# EAGLE board BigEasyDriver-Panel-v16 (EAGLE 6.6.0), part 1 of 5
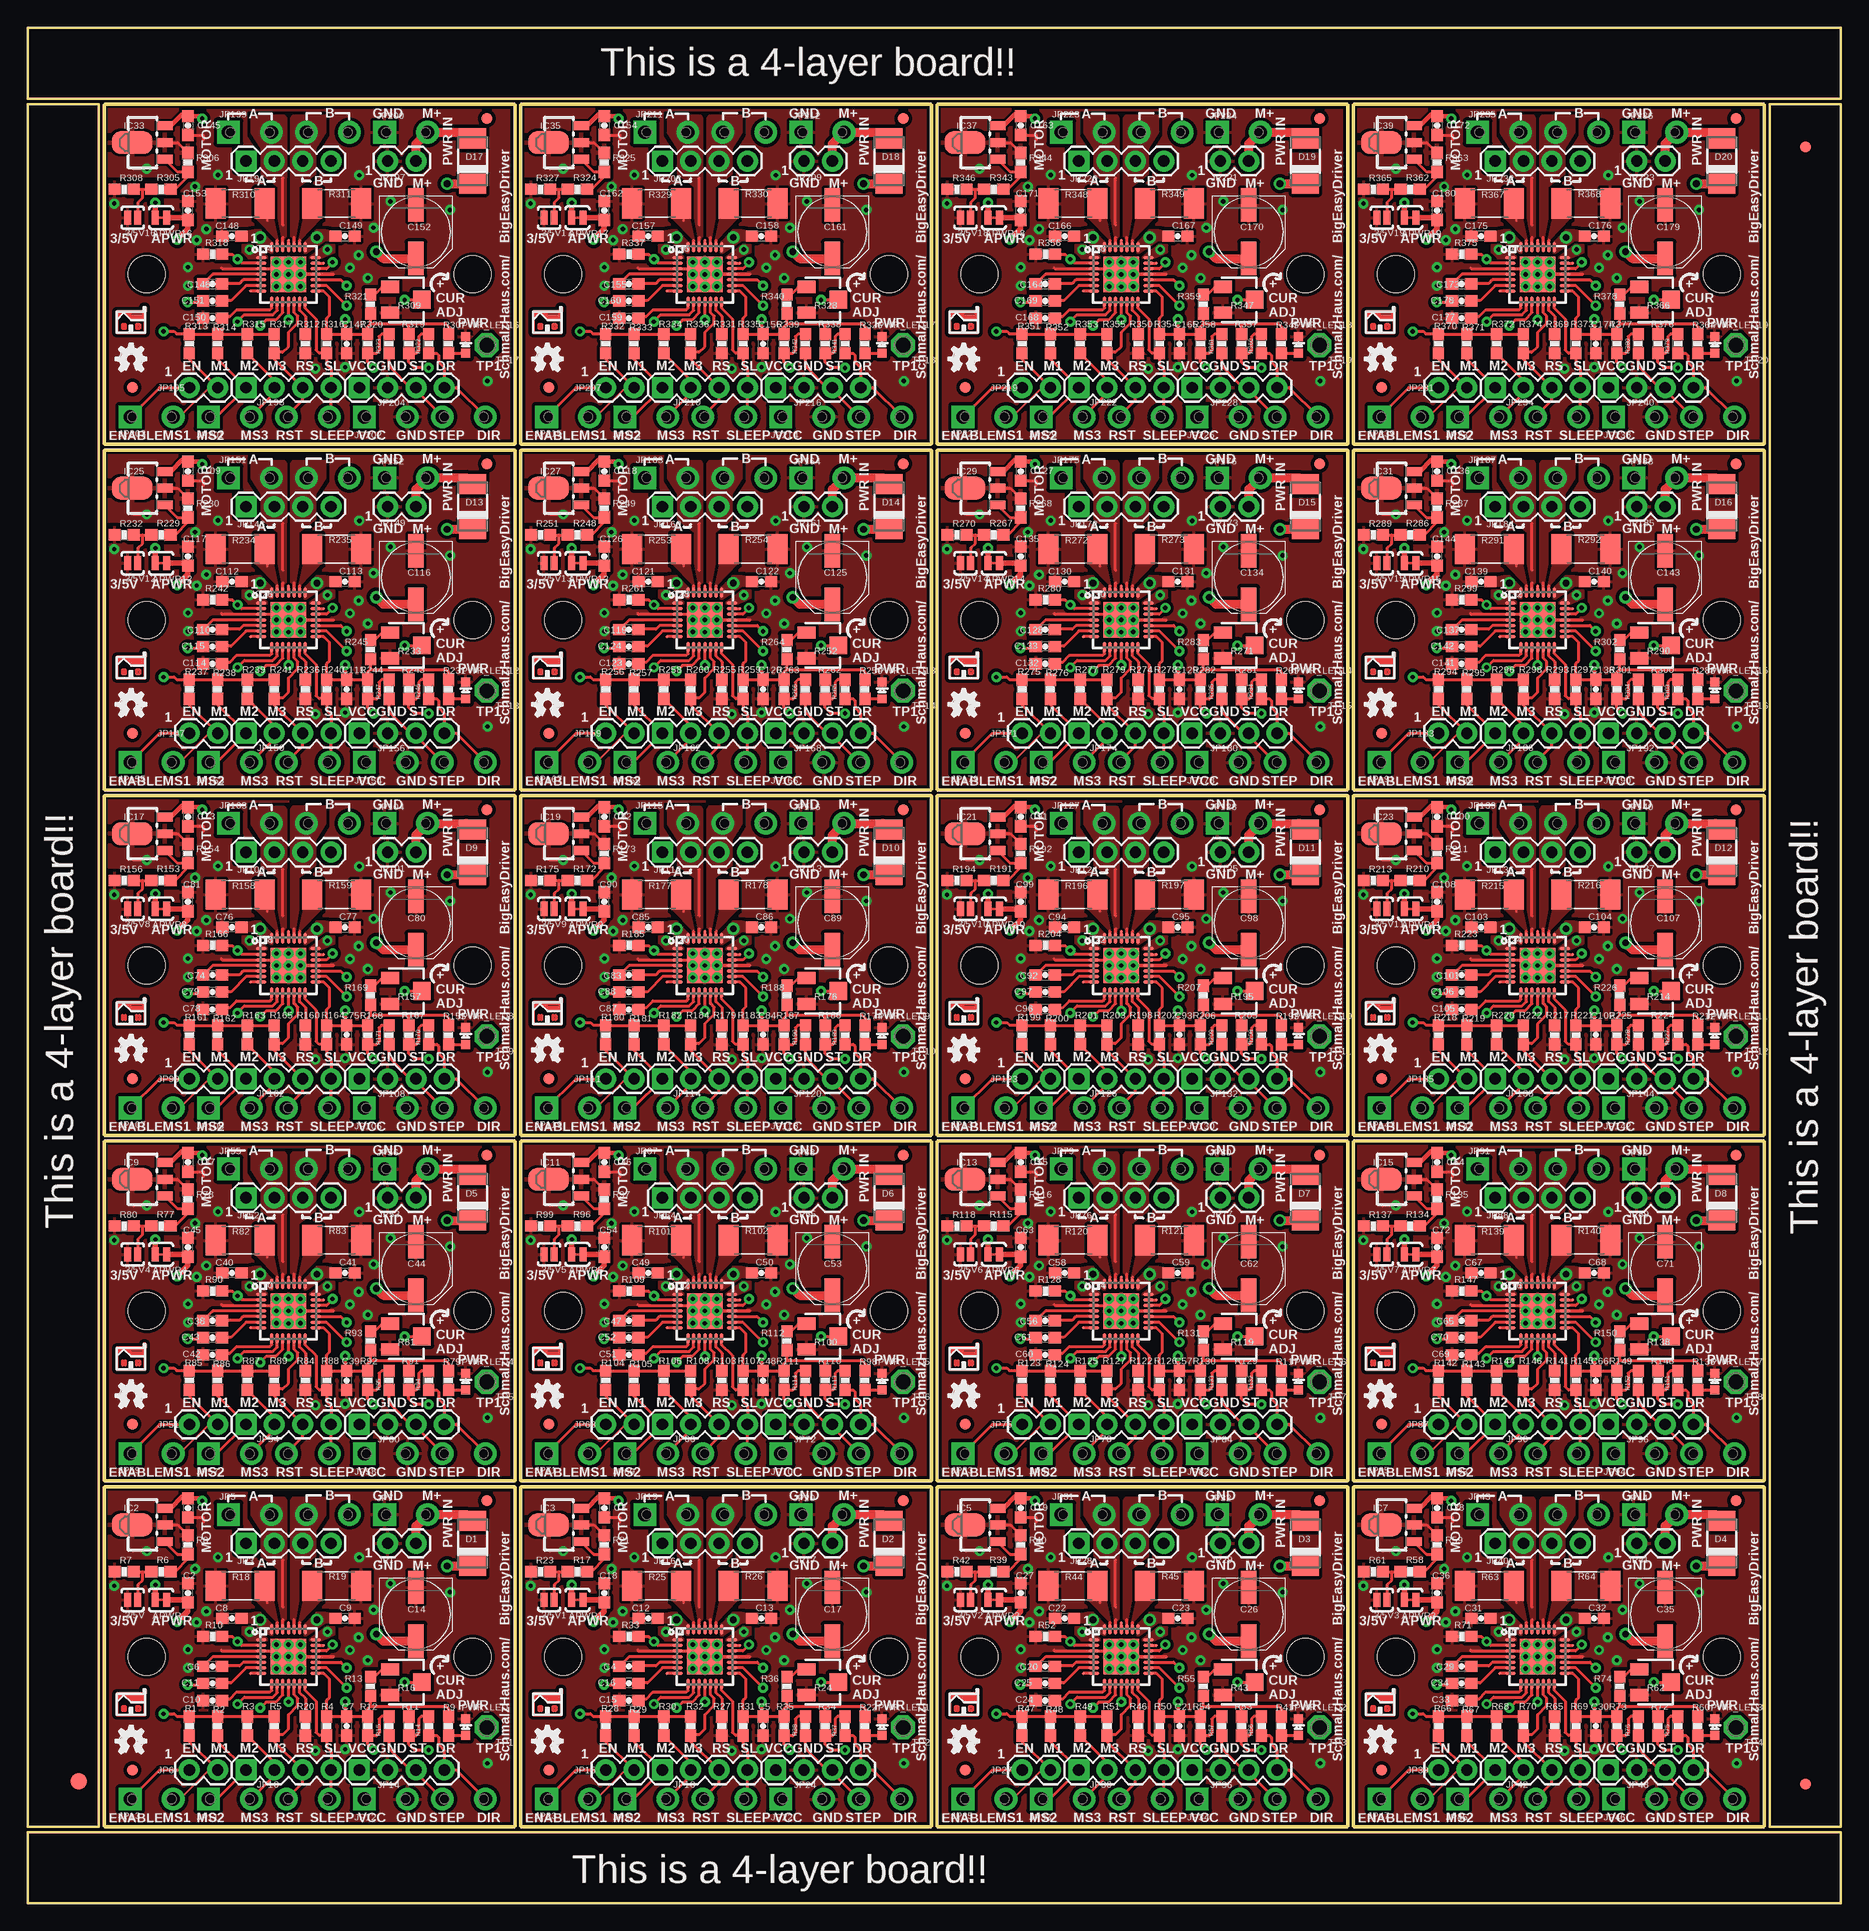
[diagram p0: board, top side]
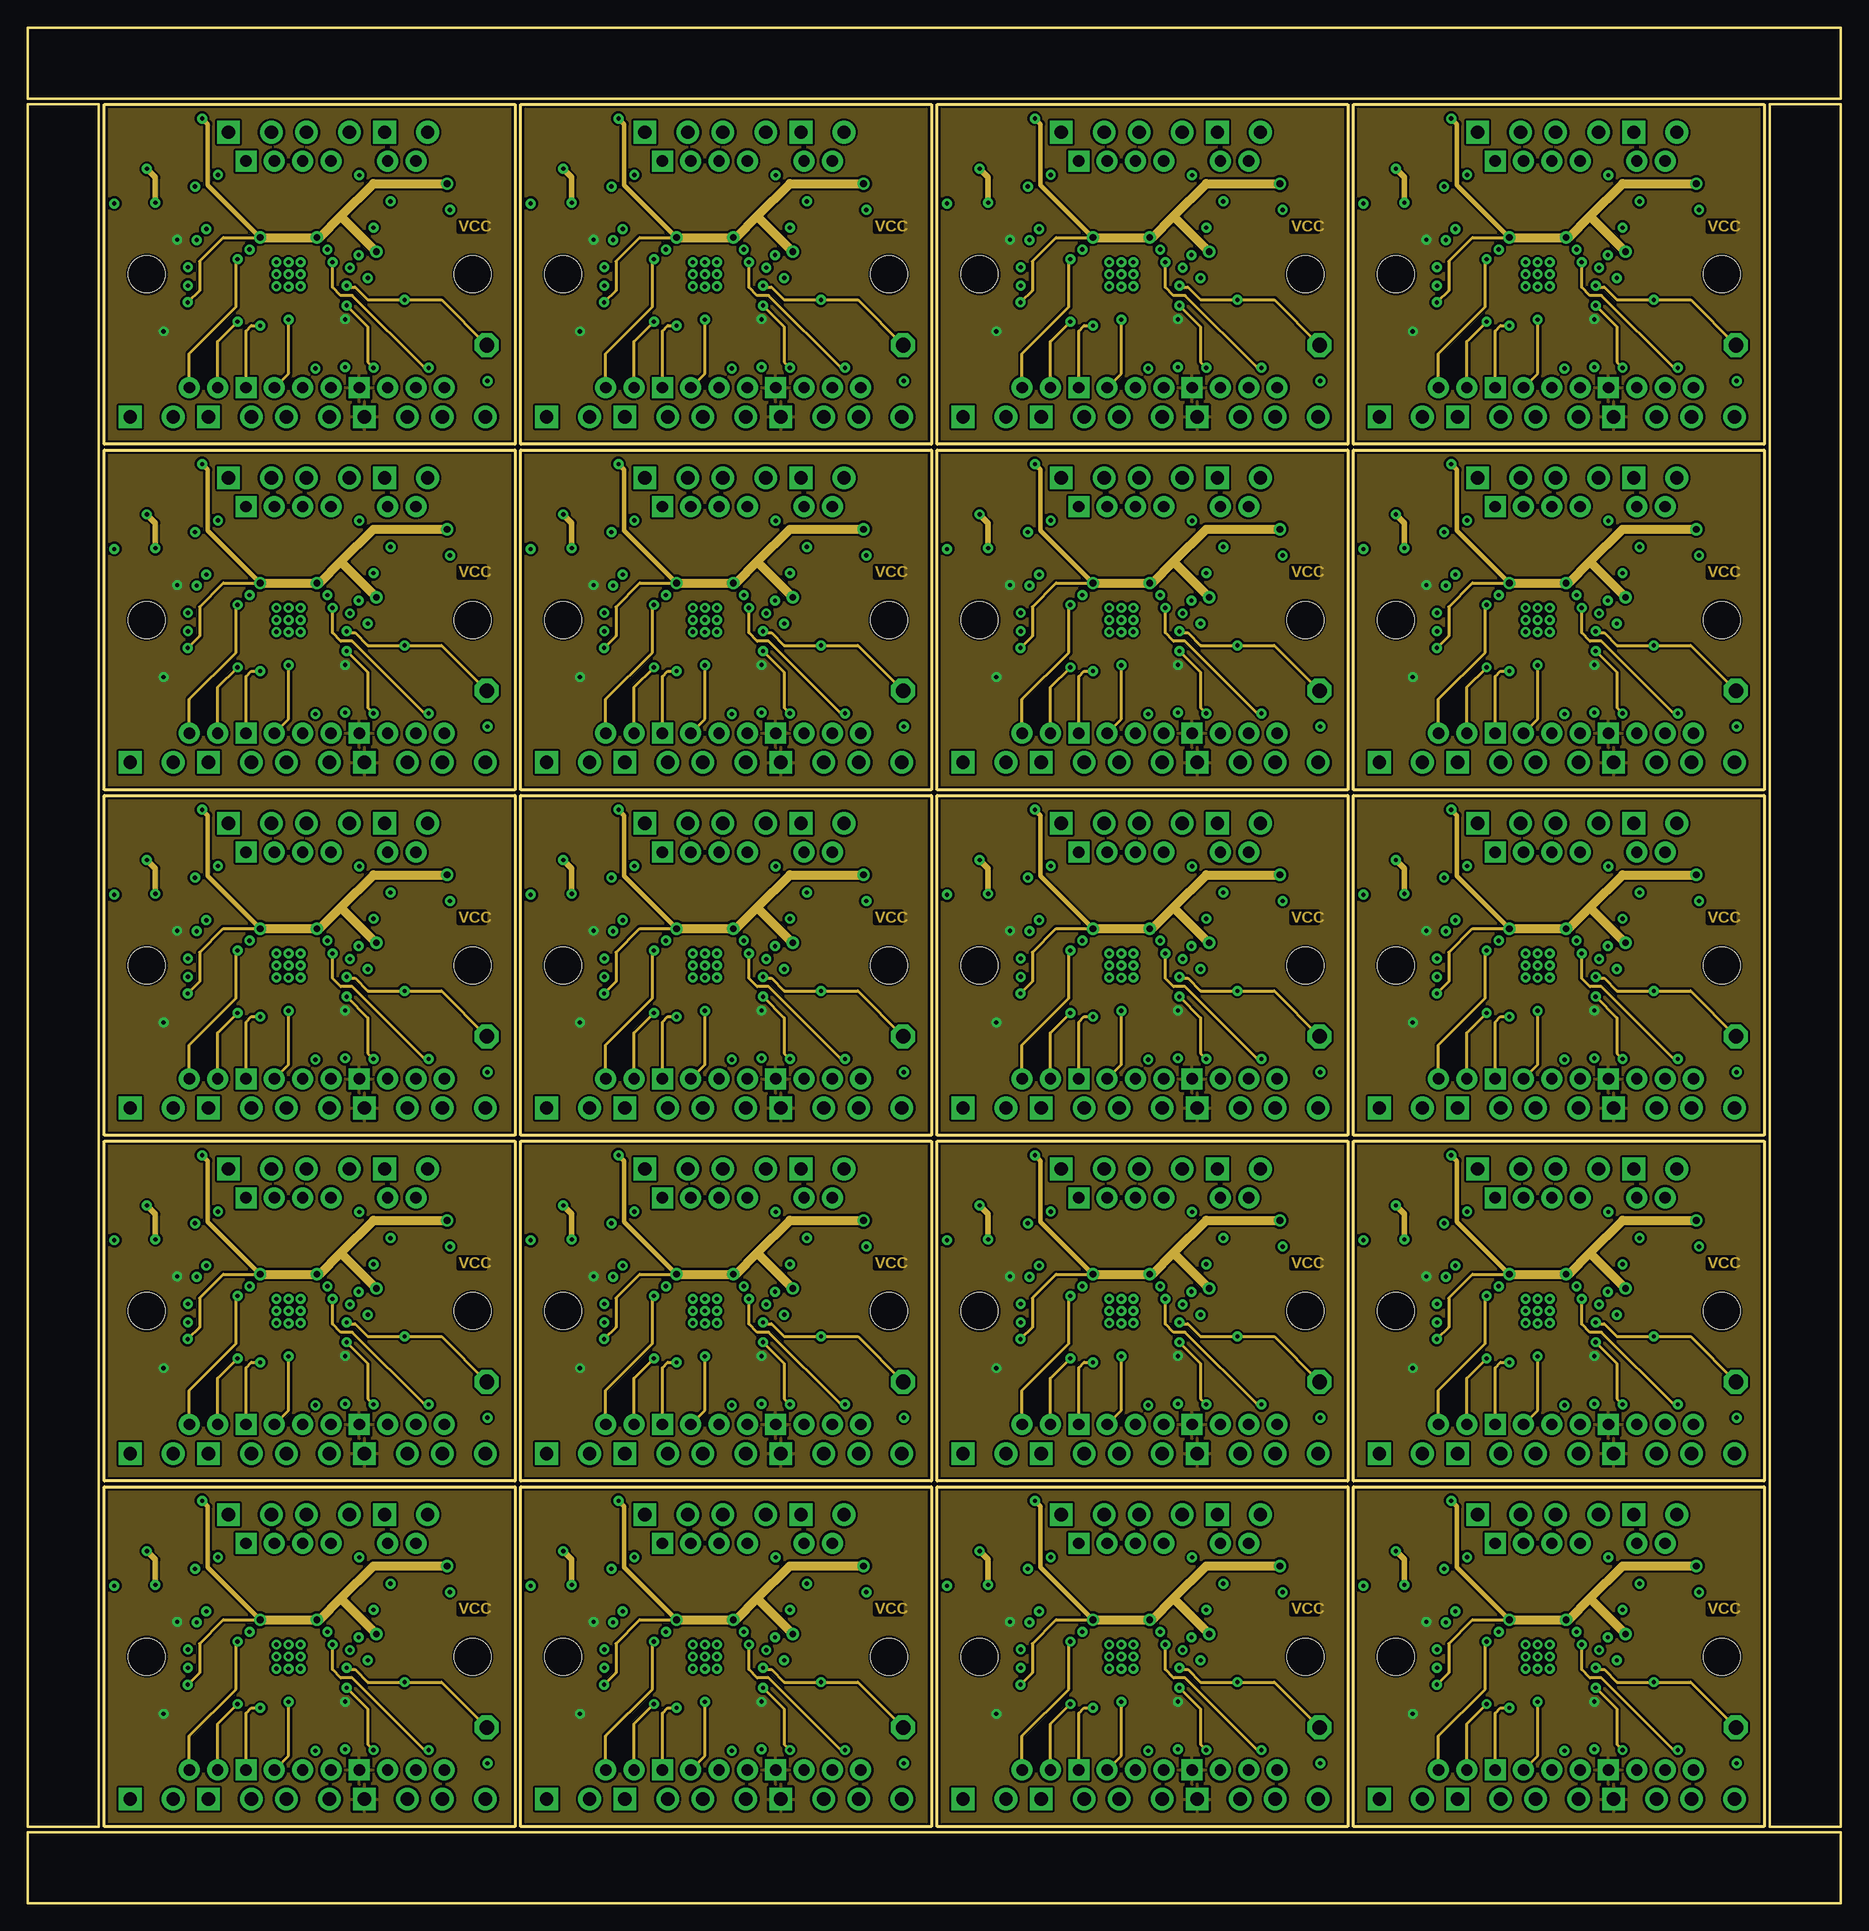
[diagram p1: board, inner layer VCC]
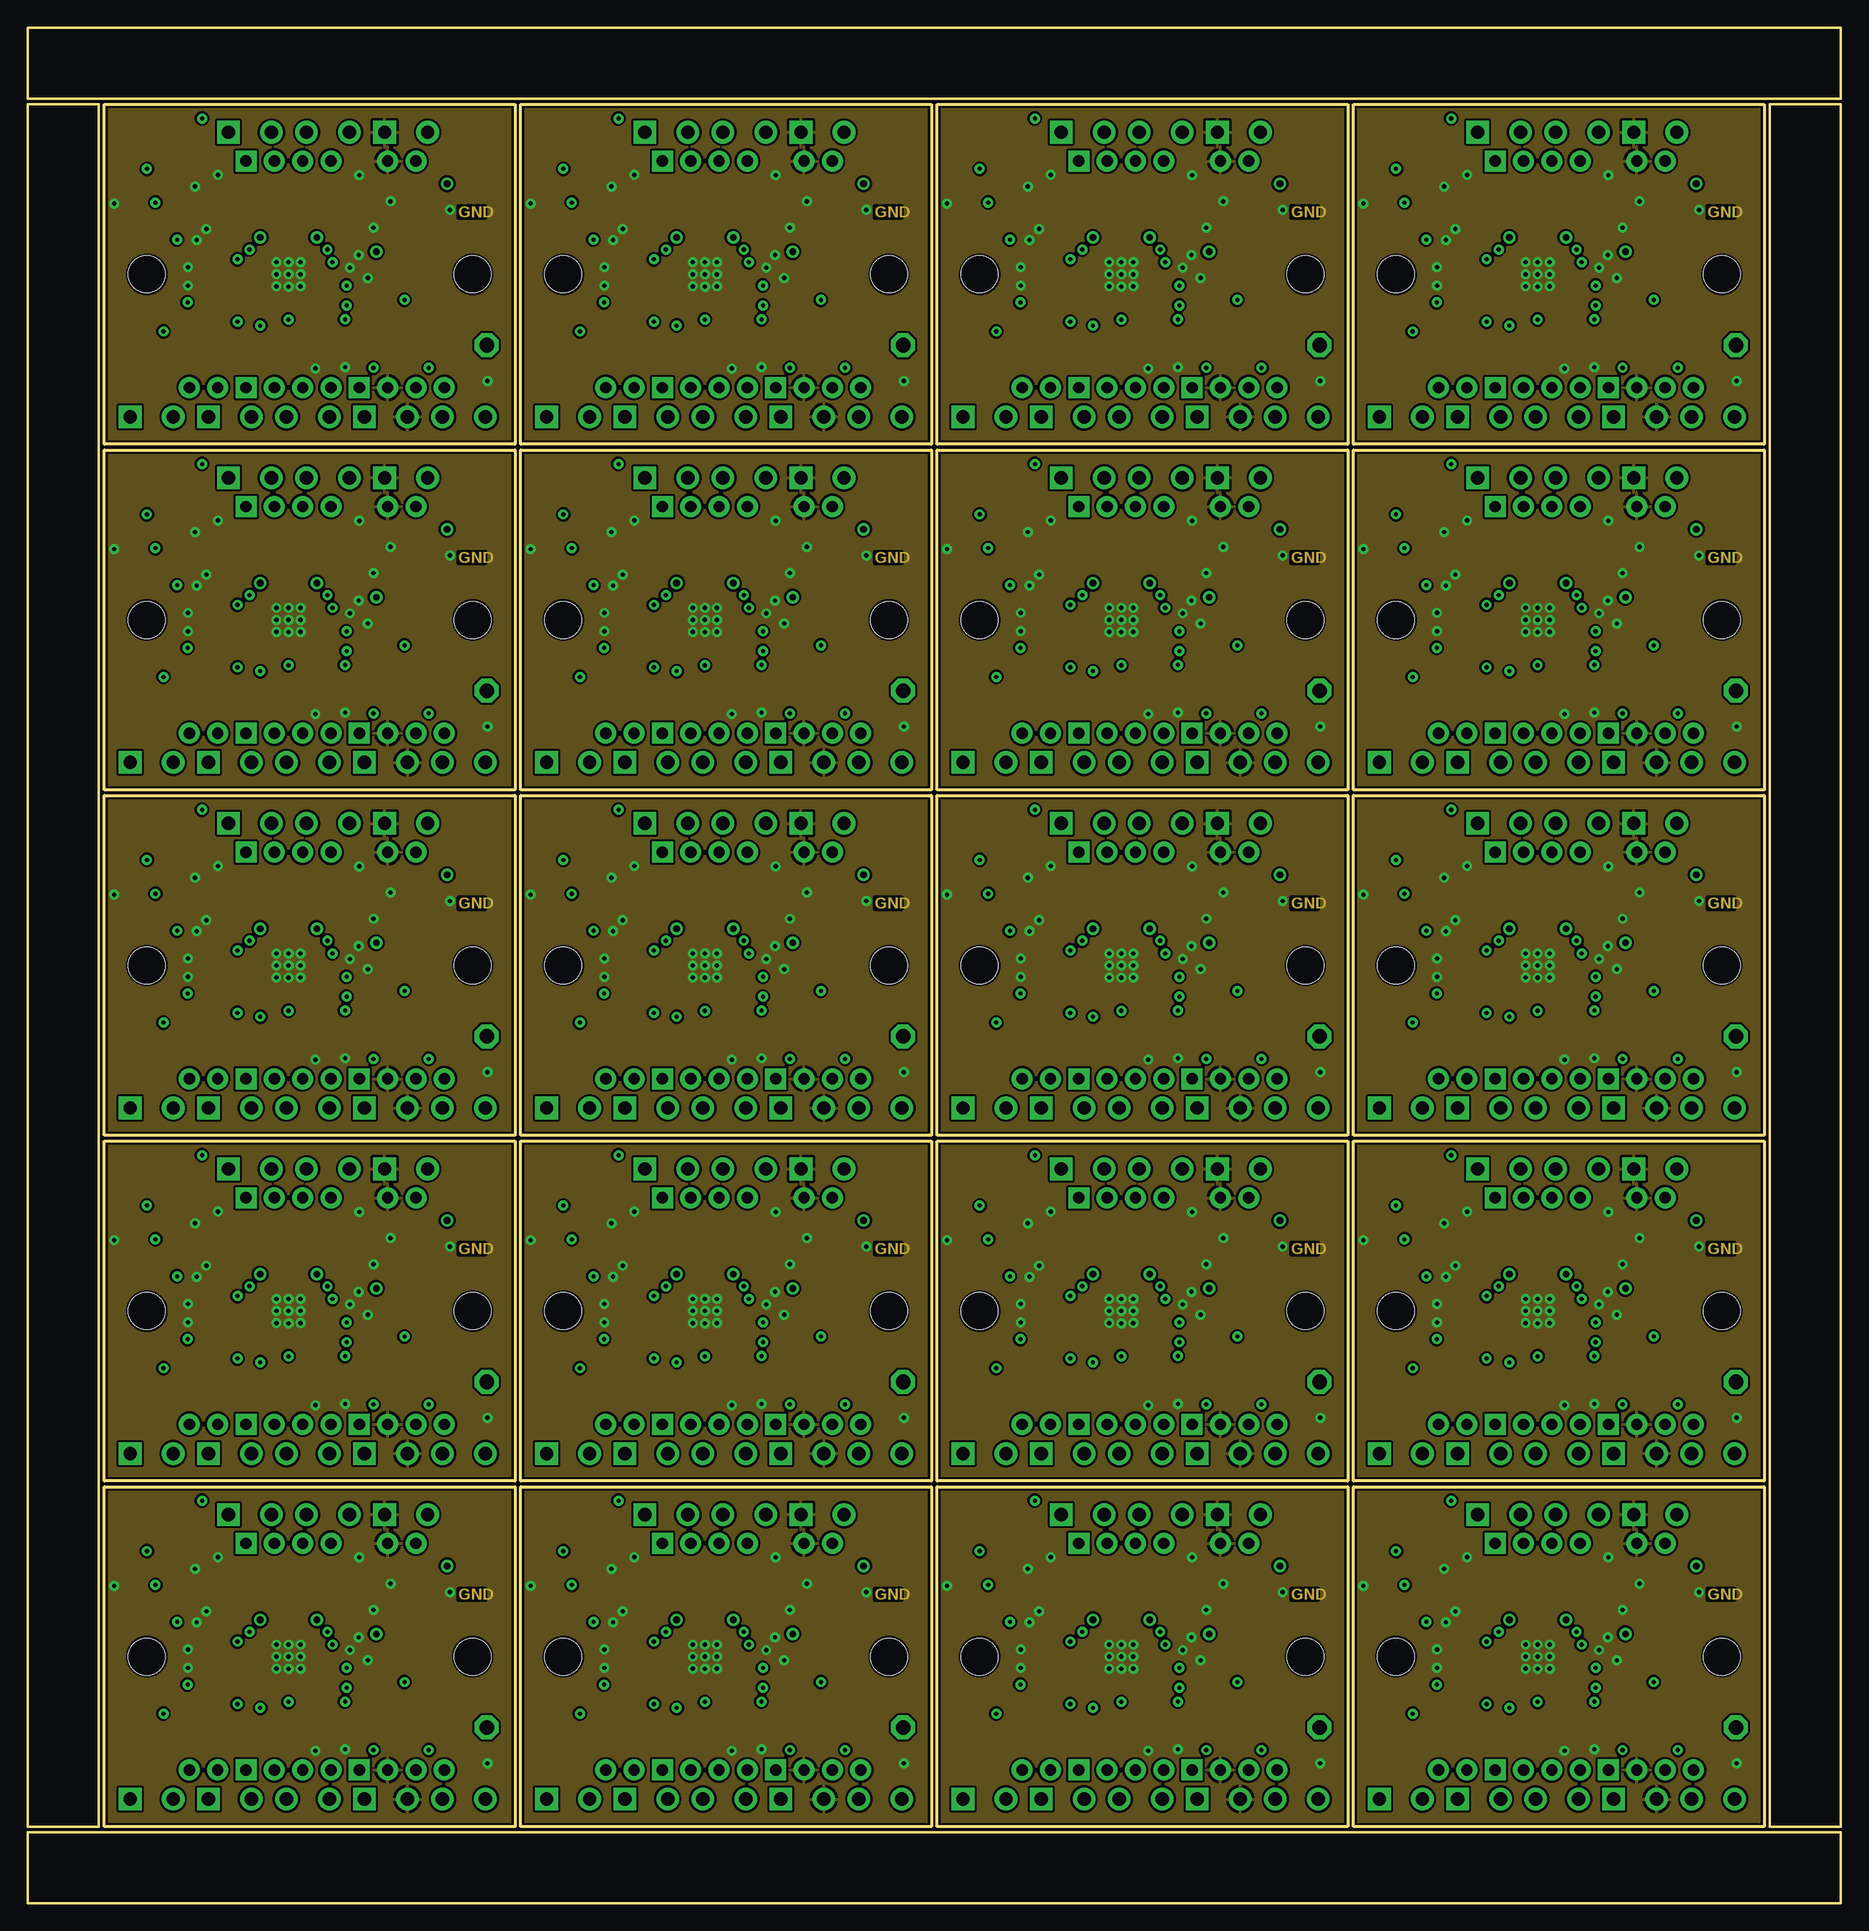
[diagram p2: board, inner layer GND]
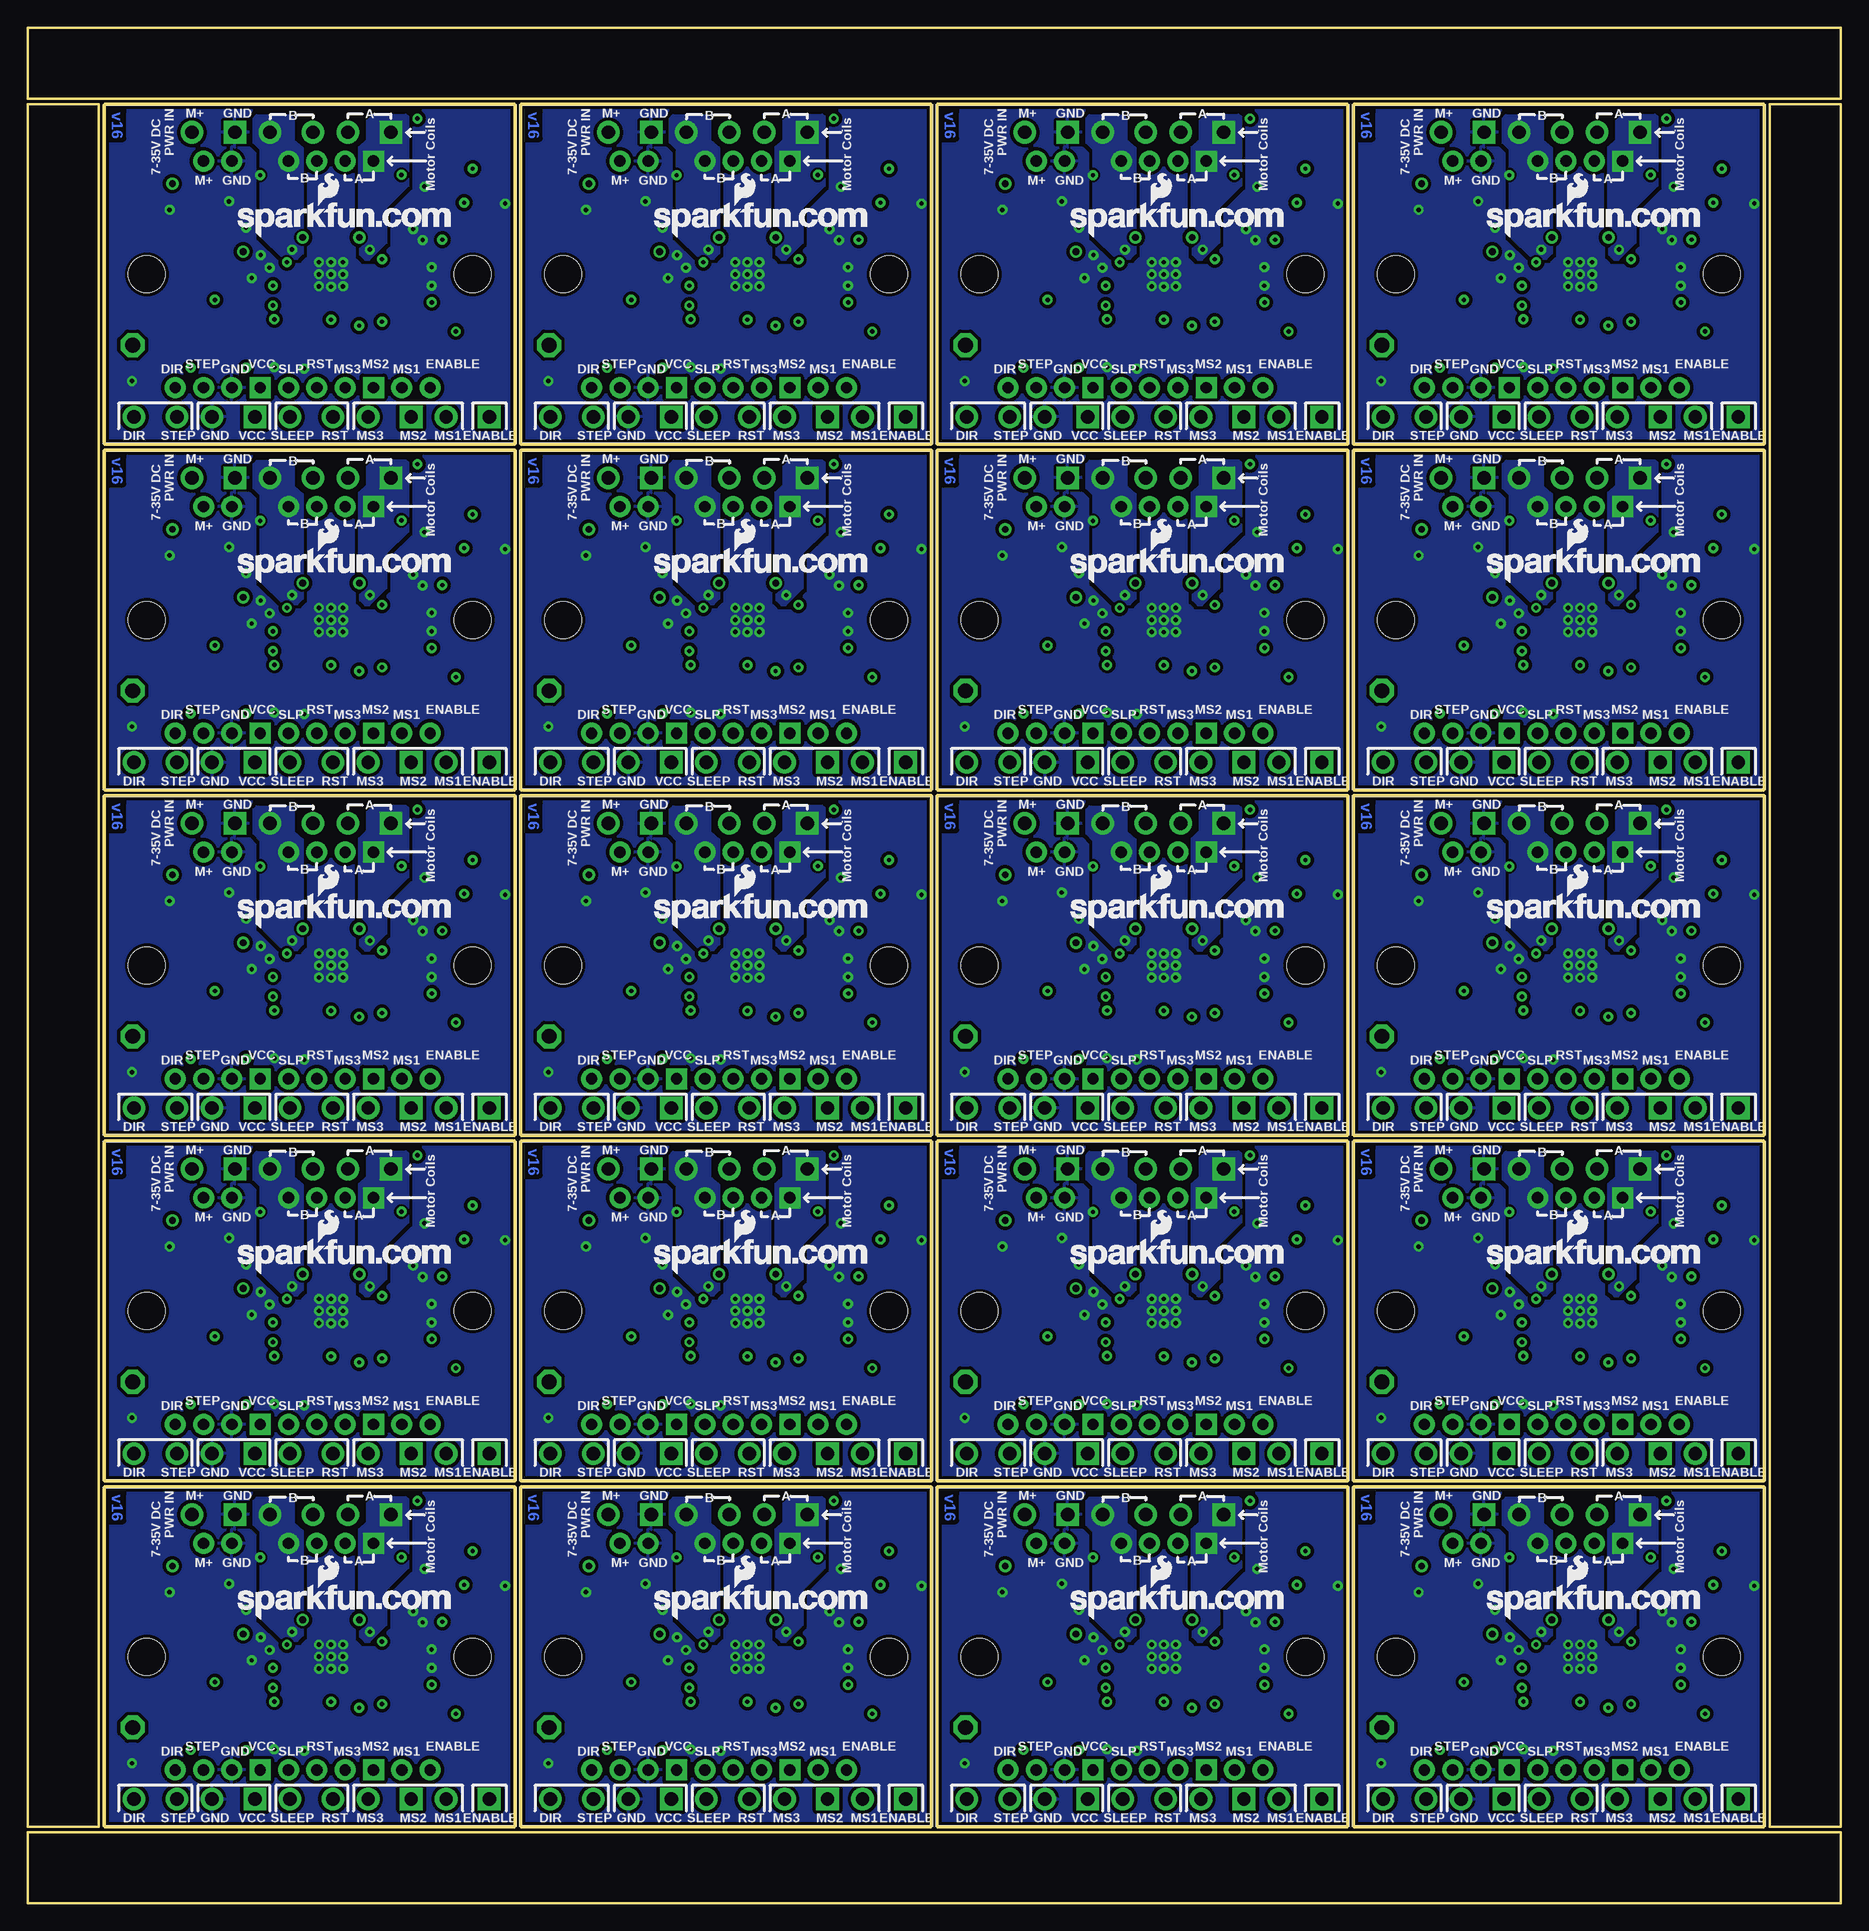
[diagram p3: board, bottom side, seen from below]

Size 162.56 x 168.15 mm. Coordinates in mm from the lower left corner, seen from the top.
Outline: 6.86,37.34 43.69,37.34 43.69,6.86 6.86,6.86 6.86,37.34
Outline: 44.2,37.34 81.03,37.34 81.03,6.86 44.2,6.86 44.2,37.34
Outline: 81.53,37.34 118.36,37.34 118.36,6.86 81.53,6.86 81.53,37.34
Outline: 118.87,37.34 155.7,37.34 155.7,6.86 118.87,6.86 118.87,37.34
Outline: 6.86,68.33 43.69,68.33 43.69,37.85 6.86,37.85 6.86,68.33
Outline: 44.2,68.33 81.03,68.33 81.03,37.85 44.2,37.85 44.2,68.33
Outline: 81.53,68.33 118.36,68.33 118.36,37.85 81.53,37.85 81.53,68.33
Outline: 118.87,68.33 155.7,68.33 155.7,37.85 118.87,37.85 118.87,68.33
Outline: 6.86,99.31 43.69,99.31 43.69,68.83 6.86,68.83 6.86,99.31
Outline: 44.2,99.31 81.03,99.31 81.03,68.83 44.2,68.83 44.2,99.31
Outline: 81.53,99.31 118.36,99.31 118.36,68.83 81.53,68.83 81.53,99.31
Outline: 118.87,99.31 155.7,99.31 155.7,68.83 118.87,68.83 118.87,99.31
Outline: 6.86,130.3 43.69,130.3 43.69,99.82 6.86,99.82 6.86,130.3
Outline: 44.2,130.3 81.03,130.3 81.03,99.82 44.2,99.82 44.2,130.3
Outline: 81.53,130.3 118.36,130.3 118.36,99.82 81.53,99.82 81.53,130.3
Outline: 118.87,130.3 155.7,130.3 155.7,99.82 118.87,99.82 118.87,130.3
Outline: 6.86,161.29 43.69,161.29 43.69,130.81 6.86,130.81 6.86,161.29
Outline: 44.2,161.29 81.03,161.29 81.03,130.81 44.2,130.81 44.2,161.29
Outline: 81.53,161.29 118.36,161.29 118.36,130.81 81.53,130.81 81.53,161.29
Outline: 118.87,161.29 155.7,161.29 155.7,130.81 118.87,130.81 118.87,161.29
Outline: 6.35,6.86 6.35,161.29 0,161.29 0,6.86 6.35,6.86
Outline: 0,6.35 0,0 162.56,0 162.56,6.35 0,6.35
Outline: 156.21,6.86 162.56,6.86 162.56,161.29 156.21,161.29 156.21,6.86
Outline: 162.56,161.8 162.56,168.15 0,168.15 0,161.8 162.56,161.8
Copper layers (1*16): Top 0.035mm / dielectric 1.5mm / Bottom 0.035mm
Design rules "SparkFun *": minimum track width 7mil, minimum drill 15mil, track to track 8mil, track to pad 8mil, pad to pad 8mil, via to via 8mil, smd to smd 8mil, copper to edge 8mil, drill to drill 8mil, minimum pad ring 12mil, minimum via ring 10mil, stop-mask expansion 4mil, vias tented up to drill 24mil, thermal gap 10mil

## Footprints (pad centres in the part's own frame; a part is rotated, then mirrored left to right if it is on the bottom)
SJ_2S-NO = smd 0.635 x 1.27: 1 -0.45,0; 2 0.45,0
SJ_2S-TRACE = smd 0.635 x 1.27: 1 -0.508,0; 2 0.508,0
0603-CAP = smd 1.1 x 1: 1 -0.85,0; 2 0.85,0
PANASONIC_D = smd 3 x 1.4: + 2.4,0; - -2.4,0
DO-214AC = smd 1.8 x 2.4: A 2.025,0; C -2.025,0
FIDUCIAL-1.5X3 = smd 1.5 x 1.5: 1 0,0
FIDUCIAL-1X2 = smd 1 x 1: 1 0,0
QFN-28-5MM_ALT1 = smd 0.94 x 0.3: P$1 -2.44,1.5; P$2 -2.44,1; P$3 -2.44,0.5; P$4 -2.44,0; P$5 -2.44,-0.5; P$6 -2.44,-1; P$7 -2.44,-1.5; P$15 2.44,-1.5; P$16 2.44,-1; P$17 2.44,-0.5; P$18 2.44,0; P$19 2.44,0.5; P$20 2.44,1; P$21 2.44,1.5 | smd 0.3 x 0.94: P$8 -1.5,-2.44; P$9 -1,-2.44; P$10 -0.5,-2.44; P$11 0,-2.44; P$12 0.5,-2.44; P$13 1,-2.44; P$14 1.5,-2.44; P$22 1.5,2.44; P$23 1,2.44; P$24 0.5,2.44; P$25 0,2.44; P$26 -0.5,2.44; P$27 -1,2.44; P$28 -1.5,2.44 | smd 3.175 x 3.175: P$29 0,0
SCHMALZHAUS_SOT89 = smd 0.8 x 1.4: ADJ -1.499,-1.981; IN 1.499,-1.981; OUT 0,-1.98 | smd 2.032 x 3.65: OUT@1 0,0.94
1X02 = drill 1.016 pad 1.88: 1 0,0; 2 2.54,0
STAND-OFF = hole 3.302: 0,0
1X04 = drill 1.016 pad 1.88 square: 1 0,0 | drill 1.016 pad 1.88: 2 2.54,0; 3 5.08,0; 4 7.62,0
SCREWTERMINAL-3.5MM-4_LOCK = drill 1.2 pad 2.032 square: 1 -0.178,0 | drill 1.2 pad 2.032: 2 3.678,0; 3 6.822,0; 4 10.678,0
SCREWTERMINAL-3.5MM-2_LOCK = drill 1.2 pad 2.032 square: 1 -0.178,0 | drill 1.2 pad 2.032: 2 3.678,0
LED-0603 = smd 0.8 x 0.8: A 0,-0.75; C 0,0.75
0603-RES = smd 1.1 x 1: 1 -0.85,0; 2 0.85,0
TRIMPOT-3MM-2 = smd 1.092 x 1.6: 1 -1.155,-1.421; 3 1.155,-1.421 | smd 1.6 x 1.6: 2 0,1.421
R2010 = smd 1.8 x 2.7: 1 -2.2,0; 2 2.2,0
P1-13 = drill 1.321 pad 2.159 octagon: TP 0,0
PAD-0.008 = smd 0.203 x 0.203: P$1 0,0

## Placement (x,y rotation side)
3/5V  SOLDERJUMPERNO  [SJ_2S-NO]  9.4,27.18 180 top
3/5V1  SOLDERJUMPERNO  [SJ_2S-NO]  46.74,27.18 180 top
3/5V2  SOLDERJUMPERNO  [SJ_2S-NO]  84.07,27.18 180 top
3/5V3  SOLDERJUMPERNO  [SJ_2S-NO]  121.41,27.18 180 top
3/5V4  SOLDERJUMPERNO  [SJ_2S-NO]  9.4,58.17 180 top
3/5V5  SOLDERJUMPERNO  [SJ_2S-NO]  46.74,58.17 180 top
3/5V6  SOLDERJUMPERNO  [SJ_2S-NO]  84.07,58.17 180 top
3/5V7  SOLDERJUMPERNO  [SJ_2S-NO]  121.41,58.17 180 top
3/5V8  SOLDERJUMPERNO  [SJ_2S-NO]  9.4,89.15 180 top
3/5V9  SOLDERJUMPERNO  [SJ_2S-NO]  46.74,89.15 180 top
3/5V10  SOLDERJUMPERNO  [SJ_2S-NO]  84.07,89.15 180 top
3/5V11  SOLDERJUMPERNO  [SJ_2S-NO]  121.41,89.15 180 top
3/5V12  SOLDERJUMPERNO  [SJ_2S-NO]  9.4,120.14 180 top
3/5V13  SOLDERJUMPERNO  [SJ_2S-NO]  46.74,120.14 180 top
3/5V14  SOLDERJUMPERNO  [SJ_2S-NO]  84.07,120.14 180 top
3/5V15  SOLDERJUMPERNO  [SJ_2S-NO]  121.41,120.14 180 top
3/5V16  SOLDERJUMPERNO  [SJ_2S-NO]  9.4,151.13 180 top
3/5V17  SOLDERJUMPERNO  [SJ_2S-NO]  46.74,151.13 180 top
3/5V18  SOLDERJUMPERNO  [SJ_2S-NO]  84.07,151.13 180 top
3/5V19  SOLDERJUMPERNO  [SJ_2S-NO]  121.41,151.13 180 top
APWR  SOLDERJUMPERTRACE  [SJ_2S-TRACE]  11.94,27.18 0 top
APWR1  SOLDERJUMPERTRACE  [SJ_2S-TRACE]  49.28,27.18 0 top
APWR2  SOLDERJUMPERTRACE  [SJ_2S-TRACE]  86.61,27.18 0 top
APWR3  SOLDERJUMPERTRACE  [SJ_2S-TRACE]  123.95,27.18 0 top
APWR4  SOLDERJUMPERTRACE  [SJ_2S-TRACE]  11.94,58.17 0 top
APWR5  SOLDERJUMPERTRACE  [SJ_2S-TRACE]  49.28,58.17 0 top
APWR6  SOLDERJUMPERTRACE  [SJ_2S-TRACE]  86.61,58.17 0 top
APWR7  SOLDERJUMPERTRACE  [SJ_2S-TRACE]  123.95,58.17 0 top
APWR8  SOLDERJUMPERTRACE  [SJ_2S-TRACE]  11.94,89.15 0 top
APWR9  SOLDERJUMPERTRACE  [SJ_2S-TRACE]  49.28,89.15 0 top
APWR10  SOLDERJUMPERTRACE  [SJ_2S-TRACE]  86.61,89.15 0 top
APWR11  SOLDERJUMPERTRACE  [SJ_2S-TRACE]  123.95,89.15 0 top
APWR12  SOLDERJUMPERTRACE  [SJ_2S-TRACE]  11.94,120.14 0 top
APWR13  SOLDERJUMPERTRACE  [SJ_2S-TRACE]  49.28,120.14 0 top
APWR14  SOLDERJUMPERTRACE  [SJ_2S-TRACE]  86.61,120.14 0 top
APWR15  SOLDERJUMPERTRACE  [SJ_2S-TRACE]  123.95,120.14 0 top
APWR16  SOLDERJUMPERTRACE  [SJ_2S-TRACE]  11.94,151.13 0 top
APWR17  SOLDERJUMPERTRACE  [SJ_2S-TRACE]  49.28,151.13 0 top
APWR18  SOLDERJUMPERTRACE  [SJ_2S-TRACE]  86.61,151.13 0 top
APWR19  SOLDERJUMPERTRACE  [SJ_2S-TRACE]  123.95,151.13 0 top
C1  .1uF  [0603-CAP]  14.35,35.43 270 top
C2  1uF  [0603-CAP]  14.35,27.81 90 top
C3  .1uF  [0603-CAP]  51.69,35.43 270 top
C4  .1uf  [0603-CAP]  53.9,21.23 0 top
C5  .1uf  [0603-CAP]  65.91,15.88 270 top
C6  .1uf  [0603-CAP]  16.56,21.23 0 top
C7  .1uf  [0603-CAP]  28.57,15.88 270 top
C8  .1uf  [0603-CAP]  18.29,25.53 180 top
C9  .1uf  [0603-CAP]  28.45,25.53 0 top
C10  .22uF  [0603-CAP]  16.56,18.16 180 top
C11  .1uf  [0603-CAP]  16.56,19.71 180 top
C12  .1uf  [0603-CAP]  55.63,25.53 180 top
C13  .1uf  [0603-CAP]  65.79,25.53 0 top
C14  47uF  [PANASONIC_D]  34.8,25.91 270 top
C15  .22uF  [0603-CAP]  53.9,18.16 180 top
C16  .1uf  [0603-CAP]  53.9,19.71 180 top
C17  47uF  [PANASONIC_D]  72.14,25.91 270 top
C18  1uF  [0603-CAP]  51.69,27.81 90 top
C19  .1uF  [0603-CAP]  89.03,35.43 270 top
C20  .1uf  [0603-CAP]  91.24,21.23 0 top
C21  .1uf  [0603-CAP]  103.25,15.88 270 top
C22  .1uf  [0603-CAP]  92.96,25.53 180 top
C23  .1uf  [0603-CAP]  103.12,25.53 0 top
C24  .22uF  [0603-CAP]  91.24,18.16 180 top
C25  .1uf  [0603-CAP]  91.24,19.71 180 top
C26  47uF  [PANASONIC_D]  109.47,25.91 270 top
C27  1uF  [0603-CAP]  89.03,27.81 90 top
C28  .1uF  [0603-CAP]  126.36,35.43 270 top
C29  .1uf  [0603-CAP]  128.57,21.23 0 top
C30  .1uf  [0603-CAP]  140.59,15.88 270 top
C31  .1uf  [0603-CAP]  130.3,25.53 180 top
C32  .1uf  [0603-CAP]  140.46,25.53 0 top
C33  .22uF  [0603-CAP]  128.57,18.16 180 top
C34  .1uf  [0603-CAP]  128.57,19.71 180 top
C35  47uF  [PANASONIC_D]  146.81,25.91 270 top
C36  1uF  [0603-CAP]  126.36,27.81 90 top
C37  .1uF  [0603-CAP]  14.35,66.42 270 top
C38  .1uf  [0603-CAP]  16.56,52.22 0 top
C39  .1uf  [0603-CAP]  28.57,46.86 270 top
C40  .1uf  [0603-CAP]  18.29,56.52 180 top
C41  .1uf  [0603-CAP]  28.45,56.52 0 top
C42  .22uF  [0603-CAP]  16.56,49.15 180 top
C43  .1uf  [0603-CAP]  16.56,50.7 180 top
C44  47uF  [PANASONIC_D]  34.8,56.9 270 top
C45  1uF  [0603-CAP]  14.35,58.8 90 top
C46  .1uF  [0603-CAP]  51.69,66.42 270 top
C47  .1uf  [0603-CAP]  53.9,52.22 0 top
C48  .1uf  [0603-CAP]  65.91,46.86 270 top
C49  .1uf  [0603-CAP]  55.63,56.52 180 top
C50  .1uf  [0603-CAP]  65.79,56.52 0 top
C51  .22uF  [0603-CAP]  53.9,49.15 180 top
C52  .1uf  [0603-CAP]  53.9,50.7 180 top
C53  47uF  [PANASONIC_D]  72.14,56.9 270 top
C54  1uF  [0603-CAP]  51.69,58.8 90 top
C55  .1uF  [0603-CAP]  89.03,66.42 270 top
C56  .1uf  [0603-CAP]  91.24,52.22 0 top
C57  .1uf  [0603-CAP]  103.25,46.86 270 top
C58  .1uf  [0603-CAP]  92.96,56.52 180 top
C59  .1uf  [0603-CAP]  103.12,56.52 0 top
C60  .22uF  [0603-CAP]  91.24,49.15 180 top
C61  .1uf  [0603-CAP]  91.24,50.7 180 top
C62  47uF  [PANASONIC_D]  109.47,56.9 270 top
C63  1uF  [0603-CAP]  89.03,58.8 90 top
C64  .1uF  [0603-CAP]  126.36,66.42 270 top
C65  .1uf  [0603-CAP]  128.57,52.22 0 top
C66  .1uf  [0603-CAP]  140.59,46.86 270 top
C67  .1uf  [0603-CAP]  130.3,56.52 180 top
C68  .1uf  [0603-CAP]  140.46,56.52 0 top
C69  .22uF  [0603-CAP]  128.57,49.15 180 top
C70  .1uf  [0603-CAP]  128.57,50.7 180 top
C71  47uF  [PANASONIC_D]  146.81,56.9 270 top
C72  1uF  [0603-CAP]  126.36,58.8 90 top
C73  .1uF  [0603-CAP]  14.35,97.41 270 top
C74  .1uf  [0603-CAP]  16.56,83.21 0 top
C75  .1uf  [0603-CAP]  28.57,77.85 270 top
C76  .1uf  [0603-CAP]  18.29,87.5 180 top
C77  .1uf  [0603-CAP]  28.45,87.5 0 top
C78  .22uF  [0603-CAP]  16.56,80.14 180 top
C79  .1uf  [0603-CAP]  16.56,81.69 180 top
C80  47uF  [PANASONIC_D]  34.8,87.88 270 top
C81  1uF  [0603-CAP]  14.35,89.79 90 top
C82  .1uF  [0603-CAP]  51.69,97.41 270 top
C83  .1uf  [0603-CAP]  53.9,83.21 0 top
C84  .1uf  [0603-CAP]  65.91,77.85 270 top
C85  .1uf  [0603-CAP]  55.63,87.5 180 top
C86  .1uf  [0603-CAP]  65.79,87.5 0 top
C87  .22uF  [0603-CAP]  53.9,80.14 180 top
C88  .1uf  [0603-CAP]  53.9,81.69 180 top
C89  47uF  [PANASONIC_D]  72.14,87.88 270 top
C90  1uF  [0603-CAP]  51.69,89.79 90 top
C91  .1uF  [0603-CAP]  89.03,97.41 270 top
C92  .1uf  [0603-CAP]  91.24,83.21 0 top
C93  .1uf  [0603-CAP]  103.25,77.85 270 top
C94  .1uf  [0603-CAP]  92.96,87.5 180 top
C95  .1uf  [0603-CAP]  103.12,87.5 0 top
C96  .22uF  [0603-CAP]  91.24,80.14 180 top
C97  .1uf  [0603-CAP]  91.24,81.69 180 top
C98  47uF  [PANASONIC_D]  109.47,87.88 270 top
C99  1uF  [0603-CAP]  89.03,89.79 90 top
C100  .1uF  [0603-CAP]  126.36,97.41 270 top
C101  .1uf  [0603-CAP]  128.57,83.21 0 top
C102  .1uf  [0603-CAP]  140.59,77.85 270 top
C103  .1uf  [0603-CAP]  130.3,87.5 180 top
C104  .1uf  [0603-CAP]  140.46,87.5 0 top
C105  .22uF  [0603-CAP]  128.57,80.14 180 top
C106  .1uf  [0603-CAP]  128.57,81.69 180 top
C107  47uF  [PANASONIC_D]  146.81,87.88 270 top
C108  1uF  [0603-CAP]  126.36,89.79 90 top
C109  .1uF  [0603-CAP]  14.35,128.4 270 top
C110  .1uf  [0603-CAP]  16.56,114.2 0 top
C111  .1uf  [0603-CAP]  28.57,108.84 270 top
C112  .1uf  [0603-CAP]  18.29,118.49 180 top
C113  .1uf  [0603-CAP]  28.45,118.49 0 top
C114  .22uF  [0603-CAP]  16.56,111.12 180 top
C115  .1uf  [0603-CAP]  16.56,112.67 180 top
C116  47uF  [PANASONIC_D]  34.8,118.87 270 top
C117  1uF  [0603-CAP]  14.35,120.78 90 top
C118  .1uF  [0603-CAP]  51.69,128.4 270 top
C119  .1uf  [0603-CAP]  53.9,114.2 0 top
C120  .1uf  [0603-CAP]  65.91,108.84 270 top
C121  .1uf  [0603-CAP]  55.63,118.49 180 top
C122  .1uf  [0603-CAP]  65.79,118.49 0 top
C123  .22uF  [0603-CAP]  53.9,111.12 180 top
C124  .1uf  [0603-CAP]  53.9,112.67 180 top
C125  47uF  [PANASONIC_D]  72.14,118.87 270 top
C126  1uF  [0603-CAP]  51.69,120.78 90 top
C127  .1uF  [0603-CAP]  89.03,128.4 270 top
C128  .1uf  [0603-CAP]  91.24,114.2 0 top
C129  .1uf  [0603-CAP]  103.25,108.84 270 top
C130  .1uf  [0603-CAP]  92.96,118.49 180 top
C131  .1uf  [0603-CAP]  103.12,118.49 0 top
C132  .22uF  [0603-CAP]  91.24,111.12 180 top
C133  .1uf  [0603-CAP]  91.24,112.67 180 top
C134  47uF  [PANASONIC_D]  109.47,118.87 270 top
C135  1uF  [0603-CAP]  89.03,120.78 90 top
C136  .1uF  [0603-CAP]  126.36,128.4 270 top
C137  .1uf  [0603-CAP]  128.57,114.2 0 top
C138  .1uf  [0603-CAP]  140.59,108.84 270 top
C139  .1uf  [0603-CAP]  130.3,118.49 180 top
C140  .1uf  [0603-CAP]  140.46,118.49 0 top
C141  .22uF  [0603-CAP]  128.57,111.12 180 top
C142  .1uf  [0603-CAP]  128.57,112.67 180 top
C143  47uF  [PANASONIC_D]  146.81,118.87 270 top
C144  1uF  [0603-CAP]  126.36,120.78 90 top
C145  .1uF  [0603-CAP]  14.35,159.38 270 top
C146  .1uf  [0603-CAP]  16.56,145.19 0 top
C147  .1uf  [0603-CAP]  28.57,139.83 270 top
C148  .1uf  [0603-CAP]  18.29,149.48 180 top
C149  .1uf  [0603-CAP]  28.45,149.48 0 top
C150  .22uF  [0603-CAP]  16.56,142.11 180 top
C151  .1uf  [0603-CAP]  16.56,143.66 180 top
C152  47uF  [PANASONIC_D]  34.8,149.86 270 top
C153  1uF  [0603-CAP]  14.35,151.76 90 top
C154  .1uF  [0603-CAP]  51.69,159.38 270 top
C155  .1uf  [0603-CAP]  53.9,145.19 0 top
C156  .1uf  [0603-CAP]  65.91,139.83 270 top
C157  .1uf  [0603-CAP]  55.63,149.48 180 top
C158  .1uf  [0603-CAP]  65.79,149.48 0 top
C159  .22uF  [0603-CAP]  53.9,142.11 180 top
C160  .1uf  [0603-CAP]  53.9,143.66 180 top
C161  47uF  [PANASONIC_D]  72.14,149.86 270 top
C162  1uF  [0603-CAP]  51.69,151.76 90 top
C163  .1uF  [0603-CAP]  89.03,159.38 270 top
C164  .1uf  [0603-CAP]  91.24,145.19 0 top
C165  .1uf  [0603-CAP]  103.25,139.83 270 top
C166  .1uf  [0603-CAP]  92.96,149.48 180 top
C167  .1uf  [0603-CAP]  103.12,149.48 0 top
C168  .22uF  [0603-CAP]  91.24,142.11 180 top
C169  .1uf  [0603-CAP]  91.24,143.66 180 top
C170  47uF  [PANASONIC_D]  109.47,149.86 270 top
C171  1uF  [0603-CAP]  89.03,151.76 90 top
C172  .1uF  [0603-CAP]  126.36,159.38 270 top
C173  .1uf  [0603-CAP]  128.57,145.19 0 top
C174  .1uf  [0603-CAP]  140.59,139.83 270 top
C175  .1uf  [0603-CAP]  130.3,149.48 180 top
C176  .1uf  [0603-CAP]  140.46,149.48 0 top
C177  .22uF  [0603-CAP]  128.57,142.11 180 top
C178  .1uf  [0603-CAP]  128.57,143.66 180 top
C179  47uF  [PANASONIC_D]  146.81,149.86 270 top
C180  1uF  [0603-CAP]  126.36,151.76 90 top
D1  B340A-13-F  [DO-214AC]  39.88,32.26 90 top
D2  B340A-13-F  [DO-214AC]  77.22,32.26 90 top
D3  B340A-13-F  [DO-214AC]  114.55,32.26 90 top
D4  B340A-13-F  [DO-214AC]  151.89,32.26 90 top
D5  B340A-13-F  [DO-214AC]  39.88,63.25 90 top
D6  B340A-13-F  [DO-214AC]  77.22,63.25 90 top
D7  B340A-13-F  [DO-214AC]  114.55,63.25 90 top
D8  B340A-13-F  [DO-214AC]  151.89,63.25 90 top
D9  B340A-13-F  [DO-214AC]  39.88,94.23 90 top
D10  B340A-13-F  [DO-214AC]  77.22,94.23 90 top
D11  B340A-13-F  [DO-214AC]  114.55,94.23 90 top
D12  B340A-13-F  [DO-214AC]  151.89,94.23 90 top
D13  B340A-13-F  [DO-214AC]  39.88,125.22 90 top
D14  B340A-13-F  [DO-214AC]  77.22,125.22 90 top
D15  B340A-13-F  [DO-214AC]  114.55,125.22 90 top
D16  B340A-13-F  [DO-214AC]  151.89,125.22 90 top
D17  B340A-13-F  [DO-214AC]  39.88,156.21 90 top
D18  B340A-13-F  [DO-214AC]  77.22,156.21 90 top
D19  B340A-13-F  [DO-214AC]  114.55,156.21 90 top
D20  B340A-13-F  [DO-214AC]  151.89,156.21 90 top
E$1  [FIDUCIAL-1.5X3]  4.57,10.92 0 top
E$4  [FIDUCIAL-1X2]  159.38,10.67 0 top
E$6  [FIDUCIAL-1X2]  159.38,157.48 180 top
FID1  FIDUCIAL1X2  [FIDUCIAL-1X2]  9.4,11.94 0 top
FID2  FIDUCIAL1X2  [FIDUCIAL-1X2]  41.15,36.07 0 top
FID3  FIDUCIAL1X2  [FIDUCIAL-1X2]  46.74,11.94 0 top
FID4  FIDUCIAL1X2  [FIDUCIAL-1X2]  78.49,36.07 0 top
FID5  FIDUCIAL1X2  [FIDUCIAL-1X2]  84.07,11.94 0 top
FID6  FIDUCIAL1X2  [FIDUCIAL-1X2]  115.82,36.07 0 top
FID7  FIDUCIAL1X2  [FIDUCIAL-1X2]  121.41,11.94 0 top
FID8  FIDUCIAL1X2  [FIDUCIAL-1X2]  153.16,36.07 0 top
FID9  FIDUCIAL1X2  [FIDUCIAL-1X2]  9.4,42.93 0 top
FID10  FIDUCIAL1X2  [FIDUCIAL-1X2]  41.15,67.06 0 top
FID11  FIDUCIAL1X2  [FIDUCIAL-1X2]  46.74,42.93 0 top
FID12  FIDUCIAL1X2  [FIDUCIAL-1X2]  78.49,67.06 0 top
FID13  FIDUCIAL1X2  [FIDUCIAL-1X2]  84.07,42.93 0 top
FID14  FIDUCIAL1X2  [FIDUCIAL-1X2]  115.82,67.06 0 top
FID15  FIDUCIAL1X2  [FIDUCIAL-1X2]  121.41,42.93 0 top
FID16  FIDUCIAL1X2  [FIDUCIAL-1X2]  153.16,67.06 0 top
FID17  FIDUCIAL1X2  [FIDUCIAL-1X2]  9.4,73.91 0 top
FID18  FIDUCIAL1X2  [FIDUCIAL-1X2]  41.15,98.04 0 top
FID19  FIDUCIAL1X2  [FIDUCIAL-1X2]  46.74,73.91 0 top
FID20  FIDUCIAL1X2  [FIDUCIAL-1X2]  78.49,98.04 0 top
FID21  FIDUCIAL1X2  [FIDUCIAL-1X2]  84.07,73.91 0 top
FID22  FIDUCIAL1X2  [FIDUCIAL-1X2]  115.82,98.04 0 top
FID23  FIDUCIAL1X2  [FIDUCIAL-1X2]  121.41,73.91 0 top
FID24  FIDUCIAL1X2  [FIDUCIAL-1X2]  153.16,98.04 0 top
FID25  FIDUCIAL1X2  [FIDUCIAL-1X2]  9.4,104.9 0 top
FID26  FIDUCIAL1X2  [FIDUCIAL-1X2]  41.15,129.03 0 top
FID27  FIDUCIAL1X2  [FIDUCIAL-1X2]  46.74,104.9 0 top
FID28  FIDUCIAL1X2  [FIDUCIAL-1X2]  78.49,129.03 0 top
FID29  FIDUCIAL1X2  [FIDUCIAL-1X2]  84.07,104.9 0 top
FID30  FIDUCIAL1X2  [FIDUCIAL-1X2]  115.82,129.03 0 top
FID31  FIDUCIAL1X2  [FIDUCIAL-1X2]  121.41,104.9 0 top
FID32  FIDUCIAL1X2  [FIDUCIAL-1X2]  153.16,129.03 0 top
FID33  FIDUCIAL1X2  [FIDUCIAL-1X2]  9.4,135.89 0 top
FID34  FIDUCIAL1X2  [FIDUCIAL-1X2]  41.15,160.02 0 top
FID35  FIDUCIAL1X2  [FIDUCIAL-1X2]  46.74,135.89 0 top
FID36  FIDUCIAL1X2  [FIDUCIAL-1X2]  78.49,160.02 0 top
FID37  FIDUCIAL1X2  [FIDUCIAL-1X2]  84.07,135.89 0 top
FID38  FIDUCIAL1X2  [FIDUCIAL-1X2]  115.82,160.02 0 top
FID39  FIDUCIAL1X2  [FIDUCIAL-1X2]  121.41,135.89 0 top
FID40  FIDUCIAL1X2  [FIDUCIAL-1X2]  153.16,160.02 0 top
IC1  A4983ALT1  [QFN-28-5MM_ALT1]  23.37,22.1 0 top
IC2  LM317L  [SCHMALZHAUS_SOT89]  10.29,33.91 90 top
IC3  LM317L  [SCHMALZHAUS_SOT89]  47.62,33.91 90 top
IC4  A4983ALT1  [QFN-28-5MM_ALT1]  60.71,22.1 0 top
IC5  LM317L  [SCHMALZHAUS_SOT89]  84.96,33.91 90 top
IC6  A4983ALT1  [QFN-28-5MM_ALT1]  98.04,22.1 0 top
IC7  LM317L  [SCHMALZHAUS_SOT89]  122.3,33.91 90 top
IC8  A4983ALT1  [QFN-28-5MM_ALT1]  135.38,22.1 0 top
IC9  LM317L  [SCHMALZHAUS_SOT89]  10.29,64.9 90 top
IC10  A4983ALT1  [QFN-28-5MM_ALT1]  23.37,53.09 0 top
IC11  LM317L  [SCHMALZHAUS_SOT89]  47.62,64.9 90 top
IC12  A4983ALT1  [QFN-28-5MM_ALT1]  60.71,53.09 0 top
IC13  LM317L  [SCHMALZHAUS_SOT89]  84.96,64.9 90 top
IC14  A4983ALT1  [QFN-28-5MM_ALT1]  98.04,53.09 0 top
IC15  LM317L  [SCHMALZHAUS_SOT89]  122.3,64.9 90 top
IC16  A4983ALT1  [QFN-28-5MM_ALT1]  135.38,53.09 0 top
IC17  LM317L  [SCHMALZHAUS_SOT89]  10.29,95.89 90 top
IC18  A4983ALT1  [QFN-28-5MM_ALT1]  23.37,84.07 0 top
IC19  LM317L  [SCHMALZHAUS_SOT89]  47.62,95.89 90 top
IC20  A4983ALT1  [QFN-28-5MM_ALT1]  60.71,84.07 0 top
IC21  LM317L  [SCHMALZHAUS_SOT89]  84.96,95.89 90 top
IC22  A4983ALT1  [QFN-28-5MM_ALT1]  98.04,84.07 0 top
IC23  LM317L  [SCHMALZHAUS_SOT89]  122.3,95.89 90 top
IC24  A4983ALT1  [QFN-28-5MM_ALT1]  135.38,84.07 0 top
IC25  LM317L  [SCHMALZHAUS_SOT89]  10.29,126.87 90 top
IC26  A4983ALT1  [QFN-28-5MM_ALT1]  23.37,115.06 0 top
IC27  LM317L  [SCHMALZHAUS_SOT89]  47.62,126.87 90 top
IC28  A4983ALT1  [QFN-28-5MM_ALT1]  60.71,115.06 0 top
IC29  LM317L  [SCHMALZHAUS_SOT89]  84.96,126.87 90 top
IC30  A4983ALT1  [QFN-28-5MM_ALT1]  98.04,115.06 0 top
IC31  LM317L  [SCHMALZHAUS_SOT89]  122.3,126.87 90 top
IC32  A4983ALT1  [QFN-28-5MM_ALT1]  135.38,115.06 0 top
IC33  LM317L  [SCHMALZHAUS_SOT89]  10.29,157.86 90 top
IC34  A4983ALT1  [QFN-28-5MM_ALT1]  23.37,146.05 0 top
IC35  LM317L  [SCHMALZHAUS_SOT89]  47.62,157.86 90 top
IC36  A4983ALT1  [QFN-28-5MM_ALT1]  60.71,146.05 0 top
IC37  LM317L  [SCHMALZHAUS_SOT89]  84.96,157.86 90 top
IC38  A4983ALT1  [QFN-28-5MM_ALT1]  98.04,146.05 0 top
IC39  LM317L  [SCHMALZHAUS_SOT89]  122.3,157.86 90 top
IC40  A4983ALT1  [QFN-28-5MM_ALT1]  135.38,146.05 0 top
JP1  [1X02]  32.26,32.26 0 top
JP2  STAND-OFF  [STAND-OFF]  48.01,22.1 0 top
JP3  [1X04]  19.56,32.26 0 top
JP4  STAND-OFF  [STAND-OFF]  77.22,22.1 0 top
JP5  [SCREWTERMINAL-3.5MM-4_LOCK]  18.17,34.84 0 top
JP6  [1X02]  14.48,11.94 0 top
JP7  [SCREWTERMINAL-3.5MM-2_LOCK]  32.17,34.84 0 top
JP8  STAND-OFF  [STAND-OFF]  10.67,22.1 0 top
JP9  STAND-OFF  [STAND-OFF]  39.88,22.1 0 top
JP10  [1X04]  19.56,11.94 0 top
JP11  [SCREWTERMINAL-3.5MM-4_LOCK]  16.36,9.32 0 top
JP12  [SCREWTERMINAL-3.5MM-4_LOCK]  30.36,9.32 0 top
JP13  [SCREWTERMINAL-3.5MM-2_LOCK]  9.36,9.32 0 top
JP14  [1X04]  29.72,11.94 0 top
JP15  [1X02]  51.82,11.94 0 top
JP16  [1X04]  56.9,32.26 0 top
JP17  [1X02]  69.6,32.26 0 top
JP18  [1X04]  56.9,11.94 0 top
JP19  [SCREWTERMINAL-3.5MM-4_LOCK]  55.51,34.84 0 top
JP20  [SCREWTERMINAL-3.5MM-2_LOCK]  69.51,34.84 0 top
JP21  [SCREWTERMINAL-3.5MM-4_LOCK]  53.7,9.32 0 top
JP22  [SCREWTERMINAL-3.5MM-4_LOCK]  67.7,9.32 0 top
JP23  [SCREWTERMINAL-3.5MM-2_LOCK]  46.7,9.32 0 top
JP24  [1X04]  67.06,11.94 0 top
JP25  STAND-OFF  [STAND-OFF]  85.34,22.1 0 top
JP26  STAND-OFF  [STAND-OFF]  114.55,22.1 0 top
JP27  [1X02]  89.15,11.94 0 top
JP28  [1X04]  94.23,32.26 0 top
JP29  [1X02]  106.93,32.26 0 top
JP30  [1X04]  94.23,11.94 0 top
JP31  [SCREWTERMINAL-3.5MM-4_LOCK]  92.84,34.84 0 top
JP32  [SCREWTERMINAL-3.5MM-2_LOCK]  106.84,34.84 0 top
JP33  [SCREWTERMINAL-3.5MM-4_LOCK]  91.03,9.32 0 top
JP34  [SCREWTERMINAL-3.5MM-4_LOCK]  105.03,9.32 0 top
JP35  [SCREWTERMINAL-3.5MM-2_LOCK]  84.03,9.32 0 top
JP36  [1X04]  104.39,11.94 0 top
JP37  STAND-OFF  [STAND-OFF]  122.68,22.1 0 top
JP38  STAND-OFF  [STAND-OFF]  151.89,22.1 0 top
JP39  [1X02]  126.49,11.94 0 top
JP40  [1X04]  131.57,32.26 0 top
JP41  [1X02]  144.27,32.26 0 top
JP42  [1X04]  131.57,11.94 0 top
JP43  [SCREWTERMINAL-3.5MM-4_LOCK]  130.18,34.84 0 top
JP44  [SCREWTERMINAL-3.5MM-2_LOCK]  144.18,34.84 0 top
JP45  [SCREWTERMINAL-3.5MM-4_LOCK]  128.37,9.32 0 top
JP46  [SCREWTERMINAL-3.5MM-4_LOCK]  142.37,9.32 0 top
JP47  [SCREWTERMINAL-3.5MM-2_LOCK]  121.37,9.32 0 top
JP48  [1X04]  141.73,11.94 0 top
JP49  STAND-OFF  [STAND-OFF]  10.67,53.09 0 top
JP50  STAND-OFF  [STAND-OFF]  39.88,53.09 0 top
JP51  [1X02]  14.48,42.93 0 top
JP52  [1X04]  19.56,63.25 0 top
JP53  [1X02]  32.26,63.25 0 top
JP54  [1X04]  19.56,42.93 0 top
JP55  [SCREWTERMINAL-3.5MM-4_LOCK]  18.17,65.83 0 top
JP56  [SCREWTERMINAL-3.5MM-2_LOCK]  32.17,65.83 0 top
JP57  [SCREWTERMINAL-3.5MM-4_LOCK]  16.36,40.31 0 top
JP58  [SCREWTERMINAL-3.5MM-4_LOCK]  30.36,40.31 0 top
JP59  [SCREWTERMINAL-3.5MM-2_LOCK]  9.36,40.31 0 top
JP60  [1X04]  29.72,42.93 0 top
JP61  STAND-OFF  [STAND-OFF]  48.01,53.09 0 top
JP62  STAND-OFF  [STAND-OFF]  77.22,53.09 0 top
JP63  [1X02]  51.82,42.93 0 top
JP64  [1X04]  56.9,63.25 0 top
JP65  [1X02]  69.6,63.25 0 top
JP66  [1X04]  56.9,42.93 0 top
JP67  [SCREWTERMINAL-3.5MM-4_LOCK]  55.51,65.83 0 top
JP68  [SCREWTERMINAL-3.5MM-2_LOCK]  69.51,65.83 0 top
JP69  [SCREWTERMINAL-3.5MM-4_LOCK]  53.7,40.31 0 top
JP70  [SCREWTERMINAL-3.5MM-4_LOCK]  67.7,40.31 0 top
JP71  [SCREWTERMINAL-3.5MM-2_LOCK]  46.7,40.31 0 top
JP72  [1X04]  67.06,42.93 0 top
JP73  STAND-OFF  [STAND-OFF]  85.34,53.09 0 top
JP74  STAND-OFF  [STAND-OFF]  114.55,53.09 0 top
JP75  [1X02]  89.15,42.93 0 top
JP76  [1X04]  94.23,63.25 0 top
JP77  [1X02]  106.93,63.25 0 top
JP78  [1X04]  94.23,42.93 0 top
JP79  [SCREWTERMINAL-3.5MM-4_LOCK]  92.84,65.83 0 top
JP80  [SCREWTERMINAL-3.5MM-2_LOCK]  106.84,65.83 0 top
JP81  [SCREWTERMINAL-3.5MM-4_LOCK]  91.03,40.31 0 top
JP82  [SCREWTERMINAL-3.5MM-4_LOCK]  105.03,40.31 0 top
JP83  [SCREWTERMINAL-3.5MM-2_LOCK]  84.03,40.31 0 top
JP84  [1X04]  104.39,42.93 0 top
JP85  STAND-OFF  [STAND-OFF]  122.68,53.09 0 top
JP86  STAND-OFF  [STAND-OFF]  151.89,53.09 0 top
JP87  [1X02]  126.49,42.93 0 top
JP88  [1X04]  131.57,63.25 0 top
JP89  [1X02]  144.27,63.25 0 top
JP90  [1X04]  131.57,42.93 0 top
JP91  [SCREWTERMINAL-3.5MM-4_LOCK]  130.18,65.83 0 top
JP92  [SCREWTERMINAL-3.5MM-2_LOCK]  144.18,65.83 0 top
JP93  [SCREWTERMINAL-3.5MM-4_LOCK]  128.37,40.31 0 top
JP94  [SCREWTERMINAL-3.5MM-4_LOCK]  142.37,40.31 0 top
JP95  [SCREWTERMINAL-3.5MM-2_LOCK]  121.37,40.31 0 top
JP96  [1X04]  141.73,42.93 0 top
JP97  STAND-OFF  [STAND-OFF]  10.67,84.07 0 top
JP98  STAND-OFF  [STAND-OFF]  39.88,84.07 0 top
JP99  [1X02]  14.48,73.91 0 top
JP100  [1X04]  19.56,94.23 0 top
JP101  [1X02]  32.26,94.23 0 top
JP102  [1X04]  19.56,73.91 0 top
JP103  [SCREWTERMINAL-3.5MM-4_LOCK]  18.17,96.81 0 top
JP104  [SCREWTERMINAL-3.5MM-2_LOCK]  32.17,96.81 0 top
JP105  [SCREWTERMINAL-3.5MM-4_LOCK]  16.36,71.29 0 top
JP106  [SCREWTERMINAL-3.5MM-4_LOCK]  30.36,71.29 0 top
JP107  [SCREWTERMINAL-3.5MM-2_LOCK]  9.36,71.29 0 top
JP108  [1X04]  29.72,73.91 0 top
JP109  STAND-OFF  [STAND-OFF]  48.01,84.07 0 top
JP110  STAND-OFF  [STAND-OFF]  77.22,84.07 0 top
JP111  [1X02]  51.82,73.91 0 top
JP112  [1X04]  56.9,94.23 0 top
JP113  [1X02]  69.6,94.23 0 top
JP114  [1X04]  56.9,73.91 0 top
JP115  [SCREWTERMINAL-3.5MM-4_LOCK]  55.51,96.81 0 top
JP116  [SCREWTERMINAL-3.5MM-2_LOCK]  69.51,96.81 0 top
JP117  [SCREWTERMINAL-3.5MM-4_LOCK]  53.7,71.29 0 top
JP118  [SCREWTERMINAL-3.5MM-4_LOCK]  67.7,71.29 0 top
JP119  [SCREWTERMINAL-3.5MM-2_LOCK]  46.7,71.29 0 top
JP120  [1X04]  67.06,73.91 0 top
JP121  STAND-OFF  [STAND-OFF]  85.34,84.07 0 top
JP122  STAND-OFF  [STAND-OFF]  114.55,84.07 0 top
JP123  [1X02]  89.15,73.91 0 top
JP124  [1X04]  94.23,94.23 0 top
JP125  [1X02]  106.93,94.23 0 top
JP126  [1X04]  94.23,73.91 0 top
JP127  [SCREWTERMINAL-3.5MM-4_LOCK]  92.84,96.81 0 top
JP128  [SCREWTERMINAL-3.5MM-2_LOCK]  106.84,96.81 0 top
JP129  [SCREWTERMINAL-3.5MM-4_LOCK]  91.03,71.29 0 top
JP130  [SCREWTERMINAL-3.5MM-4_LOCK]  105.03,71.29 0 top
JP131  [SCREWTERMINAL-3.5MM-2_LOCK]  84.03,71.29 0 top
JP132  [1X04]  104.39,73.91 0 top
JP133  STAND-OFF  [STAND-OFF]  122.68,84.07 0 top
JP134  STAND-OFF  [STAND-OFF]  151.89,84.07 0 top
JP135  [1X02]  126.49,73.91 0 top
JP136  [1X04]  131.57,94.23 0 top
JP137  [1X02]  144.27,94.23 0 top
JP138  [1X04]  131.57,73.91 0 top
JP139  [SCREWTERMINAL-3.5MM-4_LOCK]  130.18,96.81 0 top
JP140  [SCREWTERMINAL-3.5MM-2_LOCK]  144.18,96.81 0 top
JP141  [SCREWTERMINAL-3.5MM-4_LOCK]  128.37,71.29 0 top
JP142  [SCREWTERMINAL-3.5MM-4_LOCK]  142.37,71.29 0 top
JP143  [SCREWTERMINAL-3.5MM-2_LOCK]  121.37,71.29 0 top
JP144  [1X04]  141.73,73.91 0 top
JP145  STAND-OFF  [STAND-OFF]  10.67,115.06 0 top
JP146  STAND-OFF  [STAND-OFF]  39.88,115.06 0 top
JP147  [1X02]  14.48,104.9 0 top
JP148  [1X04]  19.56,125.22 0 top
JP149  [1X02]  32.26,125.22 0 top
JP150  [1X04]  19.56,104.9 0 top
JP151  [SCREWTERMINAL-3.5MM-4_LOCK]  18.17,127.8 0 top
JP152  [SCREWTERMINAL-3.5MM-2_LOCK]  32.17,127.8 0 top
JP153  [SCREWTERMINAL-3.5MM-4_LOCK]  16.36,102.28 0 top
JP154  [SCREWTERMINAL-3.5MM-4_LOCK]  30.36,102.28 0 top
JP155  [SCREWTERMINAL-3.5MM-2_LOCK]  9.36,102.28 0 top
JP156  [1X04]  29.72,104.9 0 top
JP157  STAND-OFF  [STAND-OFF]  48.01,115.06 0 top
JP158  STAND-OFF  [STAND-OFF]  77.22,115.06 0 top
JP159  [1X02]  51.82,104.9 0 top
JP160  [1X04]  56.9,125.22 0 top
JP161  [1X02]  69.6,125.22 0 top
JP162  [1X04]  56.9,104.9 0 top
JP163  [SCREWTERMINAL-3.5MM-4_LOCK]  55.51,127.8 0 top
JP164  [SCREWTERMINAL-3.5MM-2_LOCK]  69.51,127.8 0 top
JP165  [SCREWTERMINAL-3.5MM-4_LOCK]  53.7,102.28 0 top
JP166  [SCREWTERMINAL-3.5MM-4_LOCK]  67.7,102.28 0 top
JP167  [SCREWTERMINAL-3.5MM-2_LOCK]  46.7,102.28 0 top
JP168  [1X04]  67.06,104.9 0 top
JP169  STAND-OFF  [STAND-OFF]  85.34,115.06 0 top
JP170  STAND-OFF  [STAND-OFF]  114.55,115.06 0 top
JP171  [1X02]  89.15,104.9 0 top
JP172  [1X04]  94.23,125.22 0 top
JP173  [1X02]  106.93,125.22 0 top
JP174  [1X04]  94.23,104.9 0 top
JP175  [SCREWTERMINAL-3.5MM-4_LOCK]  92.84,127.8 0 top
JP176  [SCREWTERMINAL-3.5MM-2_LOCK]  106.84,127.8 0 top
JP177  [SCREWTERMINAL-3.5MM-4_LOCK]  91.03,102.28 0 top
JP178  [SCREWTERMINAL-3.5MM-4_LOCK]  105.03,102.28 0 top
JP179  [SCREWTERMINAL-3.5MM-2_LOCK]  84.03,102.28 0 top
JP180  [1X04]  104.39,104.9 0 top
JP181  STAND-OFF  [STAND-OFF]  122.68,115.06 0 top
JP182  STAND-OFF  [STAND-OFF]  151.89,115.06 0 top
JP183  [1X02]  126.49,104.9 0 top
JP184  [1X04]  131.57,125.22 0 top
JP185  [1X02]  144.27,125.22 0 top
JP186  [1X04]  131.57,104.9 0 top
JP187  [SCREWTERMINAL-3.5MM-4_LOCK]  130.18,127.8 0 top
JP188  [SCREWTERMINAL-3.5MM-2_LOCK]  144.18,127.8 0 top
JP189  [SCREWTERMINAL-3.5MM-4_LOCK]  128.37,102.28 0 top
JP190  [SCREWTERMINAL-3.5MM-4_LOCK]  142.37,102.28 0 top
JP191  [SCREWTERMINAL-3.5MM-2_LOCK]  121.37,102.28 0 top
JP192  [1X04]  141.73,104.9 0 top
JP193  STAND-OFF  [STAND-OFF]  10.67,146.05 0 top
JP194  STAND-OFF  [STAND-OFF]  39.88,146.05 0 top
JP195  [1X02]  14.48,135.89 0 top
JP196  [1X04]  19.56,156.21 0 top
JP197  [1X02]  32.26,156.21 0 top
JP198  [1X04]  19.56,135.89 0 top
JP199  [SCREWTERMINAL-3.5MM-4_LOCK]  18.17,158.79 0 top
JP200  [SCREWTERMINAL-3.5MM-2_LOCK]  32.17,158.79 0 top
JP201  [SCREWTERMINAL-3.5MM-4_LOCK]  16.36,133.27 0 top
JP202  [SCREWTERMINAL-3.5MM-4_LOCK]  30.36,133.27 0 top
JP203  [SCREWTERMINAL-3.5MM-2_LOCK]  9.36,133.27 0 top
JP204  [1X04]  29.72,135.89 0 top
JP205  STAND-OFF  [STAND-OFF]  48.01,146.05 0 top
JP206  STAND-OFF  [STAND-OFF]  77.22,146.05 0 top
JP207  [1X02]  51.82,135.89 0 top
JP208  [1X04]  56.9,156.21 0 top
JP209  [1X02]  69.6,156.21 0 top
JP210  [1X04]  56.9,135.89 0 top
JP211  [SCREWTERMINAL-3.5MM-4_LOCK]  55.51,158.79 0 top
JP212  [SCREWTERMINAL-3.5MM-2_LOCK]  69.51,158.79 0 top
JP213  [SCREWTERMINAL-3.5MM-4_LOCK]  53.7,133.27 0 top
JP214  [SCREWTERMINAL-3.5MM-4_LOCK]  67.7,133.27 0 top
JP215  [SCREWTERMINAL-3.5MM-2_LOCK]  46.7,133.27 0 top
JP216  [1X04]  67.06,135.89 0 top
JP217  STAND-OFF  [STAND-OFF]  85.34,146.05 0 top
JP218  STAND-OFF  [STAND-OFF]  114.55,146.05 0 top
JP219  [1X02]  89.15,135.89 0 top
JP220  [1X04]  94.23,156.21 0 top
JP221  [1X02]  106.93,156.21 0 top
JP222  [1X04]  94.23,135.89 0 top
JP223  [SCREWTERMINAL-3.5MM-4_LOCK]  92.84,158.79 0 top
JP224  [SCREWTERMINAL-3.5MM-2_LOCK]  106.84,158.79 0 top
JP225  [SCREWTERMINAL-3.5MM-4_LOCK]  91.03,133.27 0 top
JP226  [SCREWTERMINAL-3.5MM-4_LOCK]  105.03,133.27 0 top
JP227  [SCREWTERMINAL-3.5MM-2_LOCK]  84.03,133.27 0 top
JP228  [1X04]  104.39,135.89 0 top
JP229  STAND-OFF  [STAND-OFF]  122.68,146.05 0 top
JP230  STAND-OFF  [STAND-OFF]  151.89,146.05 0 top
JP231  [1X02]  126.49,135.89 0 top
JP232  [1X04]  131.57,156.21 0 top
JP233  [1X02]  144.27,156.21 0 top
JP234  [1X04]  131.57,135.89 0 top
JP235  [SCREWTERMINAL-3.5MM-4_LOCK]  130.18,158.79 0 top
JP236  [SCREWTERMINAL-3.5MM-2_LOCK]  144.18,158.79 0 top
JP237  [SCREWTERMINAL-3.5MM-4_LOCK]  128.37,133.27 0 top
JP238  [SCREWTERMINAL-3.5MM-4_LOCK]  142.37,133.27 0 top
JP239  [SCREWTERMINAL-3.5MM-2_LOCK]  121.37,133.27 0 top
JP240  [1X04]  141.73,135.89 0 top
LOGO1  OSHW_LOGO_FILLX0100-NT  [OSHW_FILLX100_NOTEXT]  7.85,13.39 0 top
LOGO2  OSHW_LOGO_FILLX0100-NT  [OSHW_FILLX100_NOTEXT]  45.19,13.39 0 top
LOGO3  OSHW_LOGO_FILLX0100-NT  [OSHW_FILLX100_NOTEXT]  82.52,13.39 0 top
LOGO4  OSHW_LOGO_FILLX0100-NT  [OSHW_FILLX100_NOTEXT]  119.86,13.39 0 top
LOGO5  OSHW_LOGO_FILLX0100-NT  [OSHW_FILLX100_NOTEXT]  7.85,44.37 0 top
LOGO6  OSHW_LOGO_FILLX0100-NT  [OSHW_FILLX100_NOTEXT]  45.19,44.37 0 top
LOGO7  OSHW_LOGO_FILLX0100-NT  [OSHW_FILLX100_NOTEXT]  82.52,44.37 0 top
LOGO8  OSHW_LOGO_FILLX0100-NT  [OSHW_FILLX100_NOTEXT]  119.86,44.37 0 top
LOGO9  OSHW_LOGO_FILLX0100-NT  [OSHW_FILLX100_NOTEXT]  7.85,75.36 0 top
LOGO10  OSHW_LOGO_FILLX0100-NT  [OSHW_FILLX100_NOTEXT]  45.19,75.36 0 top
LOGO11  OSHW_LOGO_FILLX0100-NT  [OSHW_FILLX100_NOTEXT]  82.52,75.36 0 top
LOGO12  OSHW_LOGO_FILLX0100-NT  [OSHW_FILLX100_NOTEXT]  119.86,75.36 0 top
LOGO13  OSHW_LOGO_FILLX0100-NT  [OSHW_FILLX100_NOTEXT]  7.85,106.35 0 top
LOGO14  OSHW_LOGO_FILLX0100-NT  [OSHW_FILLX100_NOTEXT]  45.19,106.35 0 top
LOGO15  OSHW_LOGO_FILLX0100-NT  [OSHW_FILLX100_NOTEXT]  82.52,106.35 0 top
LOGO16  OSHW_LOGO_FILLX0100-NT  [OSHW_FILLX100_NOTEXT]  119.86,106.35 0 top
LOGO17  OSHW_LOGO_FILLX0100-NT  [OSHW_FILLX100_NOTEXT]  7.85,137.34 0 top
LOGO18  OSHW_LOGO_FILLX0100-NT  [OSHW_FILLX100_NOTEXT]  45.19,137.34 0 top
LOGO19  OSHW_LOGO_FILLX0100-NT  [OSHW_FILLX100_NOTEXT]  82.52,137.34 0 top
LOGO20  OSHW_LOGO_FILLX0100-NT  [OSHW_FILLX100_NOTEXT]  119.86,137.34 0 top
PWR_LED  YELLOW  [LED-0603]  39.27,15.77 0 top
PWR_LED1  YELLOW  [LED-0603]  76.61,15.77 0 top
PWR_LED2  YELLOW  [LED-0603]  113.94,15.77 0 top
PWR_LED3  YELLOW  [LED-0603]  151.28,15.77 0 top
PWR_LED4  YELLOW  [LED-0603]  39.27,46.76 0 top
PWR_LED5  YELLOW  [LED-0603]  76.61,46.76 0 top
PWR_LED6  YELLOW  [LED-0603]  113.94,46.76 0 top
PWR_LED7  YELLOW  [LED-0603]  151.28,46.76 0 top
PWR_LED8  YELLOW  [LED-0603]  39.27,77.75 0 top
PWR_LED9  YELLOW  [LED-0603]  76.61,77.75 0 top
PWR_LED10  YELLOW  [LED-0603]  113.94,77.75 0 top
PWR_LED11  YELLOW  [LED-0603]  151.28,77.75 0 top
PWR_LED12  YELLOW  [LED-0603]  39.27,108.74 0 top
PWR_LED13  YELLOW  [LED-0603]  76.61,108.74 0 top
PWR_LED14  YELLOW  [LED-0603]  113.94,108.74 0 top
PWR_LED15  YELLOW  [LED-0603]  151.28,108.74 0 top
PWR_LED16  YELLOW  [LED-0603]  39.27,139.73 0 top
PWR_LED17  YELLOW  [LED-0603]  76.61,139.73 0 top
PWR_LED18  YELLOW  [LED-0603]  113.94,139.73 0 top
PWR_LED19  YELLOW  [LED-0603]  151.28,139.73 0 top
R1  20K  [0603-RES]  14.48,15.88 90 top
R2  20K  [0603-RES]  17.02,15.88 90 top
R3  20K  [0603-RES]  19.68,15.88 90 top
R4  20K  [0603-RES]  26.8,15.88 90 top
R5  20K  [0603-RES]  22.1,15.88 90 top
R6  390  [0603-RES]  11.94,29.72 0 top
R7  330  [0603-RES]  8.64,29.72 0 top
R8  240  [0603-RES]  14.35,32.13 90 top
R9  1K  [0603-RES]  37.72,15.88 90 top
R10  20K  [0603-RES]  16.56,23.9 180 top
R11  20K  [0603-RES]  34.16,15.88 90 top
R12  20K  [0603-RES]  30.48,15.88 90 top
R13  8.2K  [0603-RES]  30.73,19.43 90 top
R14  1K  [0603-RES]  35.94,15.88 90 top
R15  1K  [0603-RES]  32.38,15.88 90 top
R16  10K  [TRIMPOT-3MM-2]  33.91,19.81 270 top
R17  390  [0603-RES]  49.28,29.72 0 top
R18  .11  [R2010]  19.05,28.45 0 top
R19  .11  [R2010]  27.69,28.45 180 top
R20  20K  [0603-RES]  24.89,15.88 270 top
R21  240  [0603-RES]  51.69,32.13 90 top
R22  1K  [0603-RES]  75.06,15.88 90 top
R23  330  [0603-RES]  45.97,29.72 0 top
R24  10K  [TRIMPOT-3MM-2]  71.25,19.81 270 top
R25  .11  [R2010]  56.39,28.45 0 top
R26  .11  [R2010]  65.02,28.45 180 top
R27  20K  [0603-RES]  62.23,15.88 270 top
R28  20K  [0603-RES]  51.82,15.88 90 top
R29  20K  [0603-RES]  54.36,15.88 90 top
R30  20K  [0603-RES]  57.02,15.88 90 top
R31  20K  [0603-RES]  64.14,15.88 90 top
R32  20K  [0603-RES]  59.44,15.88 90 top
R33  20K  [0603-RES]  53.9,23.9 180 top
R34  20K  [0603-RES]  71.5,15.88 90 top
R35  20K  [0603-RES]  67.82,15.88 90 top
R36  8.2K  [0603-RES]  68.07,19.43 90 top
R37  1K  [0603-RES]  73.28,15.88 90 top
R38  1K  [0603-RES]  69.72,15.88 90 top
R39  390  [0603-RES]  86.61,29.72 0 top
R40  240  [0603-RES]  89.03,32.13 90 top
R41  1K  [0603-RES]  112.39,15.88 90 top
R42  330  [0603-RES]  83.31,29.72 0 top
R43  10K  [TRIMPOT-3MM-2]  108.58,19.81 270 top
R44  .11  [R2010]  93.73,28.45 0 top
R45  .11  [R2010]  102.36,28.45 180 top
R46  20K  [0603-RES]  99.57,15.88 270 top
R47  20K  [0603-RES]  89.15,15.88 90 top
R48  20K  [0603-RES]  91.69,15.88 90 top
R49  20K  [0603-RES]  94.36,15.88 90 top
R50  20K  [0603-RES]  101.47,15.88 90 top
R51  20K  [0603-RES]  96.77,15.88 90 top
R52  20K  [0603-RES]  91.24,23.9 180 top
R53  20K  [0603-RES]  108.84,15.88 90 top
R54  20K  [0603-RES]  105.16,15.88 90 top
R55  8.2K  [0603-RES]  105.41,19.43 90 top
R56  1K  [0603-RES]  110.62,15.88 90 top
R57  1K  [0603-RES]  107.06,15.88 90 top
R58  390  [0603-RES]  123.95,29.72 0 top
R59  240  [0603-RES]  126.36,32.13 90 top
R60  1K  [0603-RES]  149.73,15.88 90 top
R61  330  [0603-RES]  120.65,29.72 0 top
R62  10K  [TRIMPOT-3MM-2]  145.92,19.81 270 top
R63  .11  [R2010]  131.06,28.45 0 top
R64  .11  [R2010]  139.7,28.45 180 top
R65  20K  [0603-RES]  136.91,15.88 270 top
R66  20K  [0603-RES]  126.49,15.88 90 top
R67  20K  [0603-RES]  129.03,15.88 90 top
R68  20K  [0603-RES]  131.7,15.88 90 top
R69  20K  [0603-RES]  138.81,15.88 90 top
R70  20K  [0603-RES]  134.11,15.88 90 top
R71  20K  [0603-RES]  128.57,23.9 180 top
R72  20K  [0603-RES]  146.18,15.88 90 top
R73  20K  [0603-RES]  142.49,15.88 90 top
R74  8.2K  [0603-RES]  142.75,19.43 90 top
R75  1K  [0603-RES]  147.96,15.88 90 top
R76  1K  [0603-RES]  144.4,15.88 90 top
R77  390  [0603-RES]  11.94,60.71 0 top
R78  240  [0603-RES]  14.35,63.12 90 top
R79  1K  [0603-RES]  37.72,46.86 90 top
R80  330  [0603-RES]  8.64,60.71 0 top
R81  10K  [TRIMPOT-3MM-2]  33.91,50.8 270 top
R82  .11  [R2010]  19.05,59.44 0 top
R83  .11  [R2010]  27.69,59.44 180 top
R84  20K  [0603-RES]  24.89,46.86 270 top
R85  20K  [0603-RES]  14.48,46.86 90 top
R86  20K  [0603-RES]  17.02,46.86 90 top
R87  20K  [0603-RES]  19.68,46.86 90 top
R88  20K  [0603-RES]  26.8,46.86 90 top
R89  20K  [0603-RES]  22.1,46.86 90 top
R90  20K  [0603-RES]  16.56,54.89 180 top
R91  20K  [0603-RES]  34.16,46.86 90 top
R92  20K  [0603-RES]  30.48,46.86 90 top
R93  8.2K  [0603-RES]  30.73,50.42 90 top
R94  1K  [0603-RES]  35.94,46.86 90 top
R95  1K  [0603-RES]  32.38,46.86 90 top
R96  390  [0603-RES]  49.28,60.71 0 top
R97  240  [0603-RES]  51.69,63.12 90 top
R98  1K  [0603-RES]  75.06,46.86 90 top
R99  330  [0603-RES]  45.97,60.71 0 top
R100  10K  [TRIMPOT-3MM-2]  71.25,50.8 270 top
R101  .11  [R2010]  56.39,59.44 0 top
R102  .11  [R2010]  65.02,59.44 180 top
R103  20K  [0603-RES]  62.23,46.86 270 top
R104  20K  [0603-RES]  51.82,46.86 90 top
R105  20K  [0603-RES]  54.36,46.86 90 top
R106  20K  [0603-RES]  57.02,46.86 90 top
R107  20K  [0603-RES]  64.14,46.86 90 top
R108  20K  [0603-RES]  59.44,46.86 90 top
R109  20K  [0603-RES]  53.9,54.89 180 top
R110  20K  [0603-RES]  71.5,46.86 90 top
R111  20K  [0603-RES]  67.82,46.86 90 top
R112  8.2K  [0603-RES]  68.07,50.42 90 top
R113  1K  [0603-RES]  73.28,46.86 90 top
R114  1K  [0603-RES]  69.72,46.86 90 top
R115  390  [0603-RES]  86.61,60.71 0 top
R116  240  [0603-RES]  89.03,63.12 90 top
R117  1K  [0603-RES]  112.39,46.86 90 top
R118  330  [0603-RES]  83.31,60.71 0 top
R119  10K  [TRIMPOT-3MM-2]  108.58,50.8 270 top
R120  .11  [R2010]  93.73,59.44 0 top
R121  .11  [R2010]  102.36,59.44 180 top
R122  20K  [0603-RES]  99.57,46.86 270 top
R123  20K  [0603-RES]  89.15,46.86 90 top
R124  20K  [0603-RES]  91.69,46.86 90 top
R125  20K  [0603-RES]  94.36,46.86 90 top
R126  20K  [0603-RES]  101.47,46.86 90 top
R127  20K  [0603-RES]  96.77,46.86 90 top
R128  20K  [0603-RES]  91.24,54.89 180 top
R129  20K  [0603-RES]  108.84,46.86 90 top
R130  20K  [0603-RES]  105.16,46.86 90 top
R131  8.2K  [0603-RES]  105.41,50.42 90 top
R132  1K  [0603-RES]  110.62,46.86 90 top
R133  1K  [0603-RES]  107.06,46.86 90 top
R134  390  [0603-RES]  123.95,60.71 0 top
R135  240  [0603-RES]  126.36,63.12 90 top
R136  1K  [0603-RES]  149.73,46.86 90 top
R137  330  [0603-RES]  120.65,60.71 0 top
R138  10K  [TRIMPOT-3MM-2]  145.92,50.8 270 top
R139  .11  [R2010]  131.06,59.44 0 top
R140  .11  [R2010]  139.7,59.44 180 top
R141  20K  [0603-RES]  136.91,46.86 270 top
R142  20K  [0603-RES]  126.49,46.86 90 top
R143  20K  [0603-RES]  129.03,46.86 90 top
R144  20K  [0603-RES]  131.7,46.86 90 top
R145  20K  [0603-RES]  138.81,46.86 90 top
R146  20K  [0603-RES]  134.11,46.86 90 top
R147  20K  [0603-RES]  128.57,54.89 180 top
R148  20K  [0603-RES]  146.18,46.86 90 top
R149  20K  [0603-RES]  142.49,46.86 90 top
R150  8.2K  [0603-RES]  142.75,50.42 90 top
R151  1K  [0603-RES]  147.96,46.86 90 top
R152  1K  [0603-RES]  144.4,46.86 90 top
R153  390  [0603-RES]  11.94,91.69 0 top
R154  240  [0603-RES]  14.35,94.11 90 top
R155  1K  [0603-RES]  37.72,77.85 90 top
R156  330  [0603-RES]  8.64,91.69 0 top
R157  10K  [TRIMPOT-3MM-2]  33.91,81.79 270 top
R158  .11  [R2010]  19.05,90.42 0 top
R159  .11  [R2010]  27.69,90.42 180 top
R160  20K  [0603-RES]  24.89,77.85 270 top
R161  20K  [0603-RES]  14.48,77.85 90 top
R162  20K  [0603-RES]  17.02,77.85 90 top
R163  20K  [0603-RES]  19.68,77.85 90 top
R164  20K  [0603-RES]  26.8,77.85 90 top
R165  20K  [0603-RES]  22.1,77.85 90 top
R166  20K  [0603-RES]  16.56,85.88 180 top
R167  20K  [0603-RES]  34.16,77.85 90 top
R168  20K  [0603-RES]  30.48,77.85 90 top
R169  8.2K  [0603-RES]  30.73,81.41 90 top
R170  1K  [0603-RES]  35.94,77.85 90 top
R171  1K  [0603-RES]  32.38,77.85 90 top
R172  390  [0603-RES]  49.28,91.69 0 top
R173  240  [0603-RES]  51.69,94.11 90 top
R174  1K  [0603-RES]  75.06,77.85 90 top
R175  330  [0603-RES]  45.97,91.69 0 top
R176  10K  [TRIMPOT-3MM-2]  71.25,81.79 270 top
R177  .11  [R2010]  56.39,90.42 0 top
R178  .11  [R2010]  65.02,90.42 180 top
R179  20K  [0603-RES]  62.23,77.85 270 top
R180  20K  [0603-RES]  51.82,77.85 90 top
R181  20K  [0603-RES]  54.36,77.85 90 top
R182  20K  [0603-RES]  57.02,77.85 90 top
R183  20K  [0603-RES]  64.14,77.85 90 top
R184  20K  [0603-RES]  59.44,77.85 90 top
R185  20K  [0603-RES]  53.9,85.88 180 top
R186  20K  [0603-RES]  71.5,77.85 90 top
R187  20K  [0603-RES]  67.82,77.85 90 top
R188  8.2K  [0603-RES]  68.07,81.41 90 top
R189  1K  [0603-RES]  73.28,77.85 90 top
R190  1K  [0603-RES]  69.72,77.85 90 top
R191  390  [0603-RES]  86.61,91.69 0 top
R192  240  [0603-RES]  89.03,94.11 90 top
R193  1K  [0603-RES]  112.39,77.85 90 top
R194  330  [0603-RES]  83.31,91.69 0 top
R195  10K  [TRIMPOT-3MM-2]  108.58,81.79 270 top
R196  .11  [R2010]  93.73,90.42 0 top
R197  .11  [R2010]  102.36,90.42 180 top
R198  20K  [0603-RES]  99.57,77.85 270 top
R199  20K  [0603-RES]  89.15,77.85 90 top
R200  20K  [0603-RES]  91.69,77.85 90 top
R201  20K  [0603-RES]  94.36,77.85 90 top
R202  20K  [0603-RES]  101.47,77.85 90 top
R203  20K  [0603-RES]  96.77,77.85 90 top
R204  20K  [0603-RES]  91.24,85.88 180 top
R205  20K  [0603-RES]  108.84,77.85 90 top
R206  20K  [0603-RES]  105.16,77.85 90 top
R207  8.2K  [0603-RES]  105.41,81.41 90 top
R208  1K  [0603-RES]  110.62,77.85 90 top
R209  1K  [0603-RES]  107.06,77.85 90 top
R210  390  [0603-RES]  123.95,91.69 0 top
R211  240  [0603-RES]  126.36,94.11 90 top
R212  1K  [0603-RES]  149.73,77.85 90 top
R213  330  [0603-RES]  120.65,91.69 0 top
R214  10K  [TRIMPOT-3MM-2]  145.92,81.79 270 top
R215  .11  [R2010]  131.06,90.42 0 top
R216  .11  [R2010]  139.7,90.42 180 top
R217  20K  [0603-RES]  136.91,77.85 270 top
R218  20K  [0603-RES]  126.49,77.85 90 top
R219  20K  [0603-RES]  129.03,77.85 90 top
R220  20K  [0603-RES]  131.7,77.85 90 top
R221  20K  [0603-RES]  138.81,77.85 90 top
R222  20K  [0603-RES]  134.11,77.85 90 top
R223  20K  [0603-RES]  128.57,85.88 180 top
R224  20K  [0603-RES]  146.18,77.85 90 top
R225  20K  [0603-RES]  142.49,77.85 90 top
R226  8.2K  [0603-RES]  142.75,81.41 90 top
R227  1K  [0603-RES]  147.96,77.85 90 top
R228  1K  [0603-RES]  144.4,77.85 90 top
R229  390  [0603-RES]  11.94,122.68 0 top
R230  240  [0603-RES]  14.35,125.09 90 top
R231  1K  [0603-RES]  37.72,108.84 90 top
R232  330  [0603-RES]  8.64,122.68 0 top
R233  10K  [TRIMPOT-3MM-2]  33.91,112.78 270 top
R234  .11  [R2010]  19.05,121.41 0 top
R235  .11  [R2010]  27.69,121.41 180 top
R236  20K  [0603-RES]  24.89,108.84 270 top
R237  20K  [0603-RES]  14.48,108.84 90 top
R238  20K  [0603-RES]  17.02,108.84 90 top
R239  20K  [0603-RES]  19.68,108.84 90 top
R240  20K  [0603-RES]  26.8,108.84 90 top
R241  20K  [0603-RES]  22.1,108.84 90 top
R242  20K  [0603-RES]  16.56,116.87 180 top
R243  20K  [0603-RES]  34.16,108.84 90 top
R244  20K  [0603-RES]  30.48,108.84 90 top
R245  8.2K  [0603-RES]  30.73,112.39 90 top
R246  1K  [0603-RES]  35.94,108.84 90 top
R247  1K  [0603-RES]  32.38,108.84 90 top
R248  390  [0603-RES]  49.28,122.68 0 top
R249  240  [0603-RES]  51.69,125.09 90 top
R250  1K  [0603-RES]  75.06,108.84 90 top
R251  330  [0603-RES]  45.97,122.68 0 top
R252  10K  [TRIMPOT-3MM-2]  71.25,112.78 270 top
R253  .11  [R2010]  56.39,121.41 0 top
R254  .11  [R2010]  65.02,121.41 180 top
R255  20K  [0603-RES]  62.23,108.84 270 top
R256  20K  [0603-RES]  51.82,108.84 90 top
R257  20K  [0603-RES]  54.36,108.84 90 top
R258  20K  [0603-RES]  57.02,108.84 90 top
R259  20K  [0603-RES]  64.14,108.84 90 top
R260  20K  [0603-RES]  59.44,108.84 90 top
R261  20K  [0603-RES]  53.9,116.87 180 top
R262  20K  [0603-RES]  71.5,108.84 90 top
R263  20K  [0603-RES]  67.82,108.84 90 top
R264  8.2K  [0603-RES]  68.07,112.39 90 top
R265  1K  [0603-RES]  73.28,108.84 90 top
R266  1K  [0603-RES]  69.72,108.84 90 top
R267  390  [0603-RES]  86.61,122.68 0 top
R268  240  [0603-RES]  89.03,125.09 90 top
R269  1K  [0603-RES]  112.39,108.84 90 top
R270  330  [0603-RES]  83.31,122.68 0 top
R271  10K  [TRIMPOT-3MM-2]  108.58,112.78 270 top
R272  .11  [R2010]  93.73,121.41 0 top
R273  .11  [R2010]  102.36,121.41 180 top
R274  20K  [0603-RES]  99.57,108.84 270 top
R275  20K  [0603-RES]  89.15,108.84 90 top
R276  20K  [0603-RES]  91.69,108.84 90 top
R277  20K  [0603-RES]  94.36,108.84 90 top
R278  20K  [0603-RES]  101.47,108.84 90 top
R279  20K  [0603-RES]  96.77,108.84 90 top
R280  20K  [0603-RES]  91.24,116.87 180 top
R281  20K  [0603-RES]  108.84,108.84 90 top
R282  20K  [0603-RES]  105.16,108.84 90 top
R283  8.2K  [0603-RES]  105.41,112.39 90 top
R284  1K  [0603-RES]  110.62,108.84 90 top
R285  1K  [0603-RES]  107.06,108.84 90 top
R286  390  [0603-RES]  123.95,122.68 0 top
R287  240  [0603-RES]  126.36,125.09 90 top
R288  1K  [0603-RES]  149.73,108.84 90 top
R289  330  [0603-RES]  120.65,122.68 0 top
R290  10K  [TRIMPOT-3MM-2]  145.92,112.78 270 top
R291  .11  [R2010]  131.06,121.41 0 top
R292  .11  [R2010]  139.7,121.41 180 top
R293  20K  [0603-RES]  136.91,108.84 270 top
R294  20K  [0603-RES]  126.49,108.84 90 top
R295  20K  [0603-RES]  129.03,108.84 90 top
R296  20K  [0603-RES]  131.7,108.84 90 top
R297  20K  [0603-RES]  138.81,108.84 90 top
R298  20K  [0603-RES]  134.11,108.84 90 top
R299  20K  [0603-RES]  128.57,116.87 180 top
R300  20K  [0603-RES]  146.18,108.84 90 top
R301  20K  [0603-RES]  142.49,108.84 90 top
R302  8.2K  [0603-RES]  142.75,112.39 90 top
R303  1K  [0603-RES]  147.96,108.84 90 top
R304  1K  [0603-RES]  144.4,108.84 90 top
R305  390  [0603-RES]  11.94,153.67 0 top
R306  240  [0603-RES]  14.35,156.08 90 top
R307  1K  [0603-RES]  37.72,139.83 90 top
R308  330  [0603-RES]  8.64,153.67 0 top
R309  10K  [TRIMPOT-3MM-2]  33.91,143.76 270 top
R310  .11  [R2010]  19.05,152.4 0 top
R311  .11  [R2010]  27.69,152.4 180 top
R312  20K  [0603-RES]  24.89,139.83 270 top
R313  20K  [0603-RES]  14.48,139.83 90 top
R314  20K  [0603-RES]  17.02,139.83 90 top
R315  20K  [0603-RES]  19.68,139.83 90 top
R316  20K  [0603-RES]  26.8,139.83 90 top
R317  20K  [0603-RES]  22.1,139.83 90 top
R318  20K  [0603-RES]  16.56,147.85 180 top
R319  20K  [0603-RES]  34.16,139.83 90 top
R320  20K  [0603-RES]  30.48,139.83 90 top
R321  8.2K  [0603-RES]  30.73,143.38 90 top
R322  1K  [0603-RES]  35.94,139.83 90 top
R323  1K  [0603-RES]  32.38,139.83 90 top
R324  390  [0603-RES]  49.28,153.67 0 top
R325  240  [0603-RES]  51.69,156.08 90 top
R326  1K  [0603-RES]  75.06,139.83 90 top
R327  330  [0603-RES]  45.97,153.67 0 top
R328  10K  [TRIMPOT-3MM-2]  71.25,143.76 270 top
R329  .11  [R2010]  56.39,152.4 0 top
R330  .11  [R2010]  65.02,152.4 180 top
R331  20K  [0603-RES]  62.23,139.83 270 top
R332  20K  [0603-RES]  51.82,139.83 90 top
R333  20K  [0603-RES]  54.36,139.83 90 top
R334  20K  [0603-RES]  57.02,139.83 90 top
R335  20K  [0603-RES]  64.14,139.83 90 top
R336  20K  [0603-RES]  59.44,139.83 90 top
R337  20K  [0603-RES]  53.9,147.85 180 top
R338  20K  [0603-RES]  71.5,139.83 90 top
R339  20K  [0603-RES]  67.82,139.83 90 top
R340  8.2K  [0603-RES]  68.07,143.38 90 top
R341  1K  [0603-RES]  73.28,139.83 90 top
R342  1K  [0603-RES]  69.72,139.83 90 top
R343  390  [0603-RES]  86.61,153.67 0 top
R344  240  [0603-RES]  89.03,156.08 90 top
R345  1K  [0603-RES]  112.39,139.83 90 top
R346  330  [0603-RES]  83.31,153.67 0 top
R347  10K  [TRIMPOT-3MM-2]  108.58,143.76 270 top
R348  .11  [R2010]  93.73,152.4 0 top
R349  .11  [R2010]  102.36,152.4 180 top
R350  20K  [0603-RES]  99.57,139.83 270 top
R351  20K  [0603-RES]  89.15,139.83 90 top
R352  20K  [0603-RES]  91.69,139.83 90 top
R353  20K  [0603-RES]  94.36,139.83 90 top
R354  20K  [0603-RES]  101.47,139.83 90 top
R355  20K  [0603-RES]  96.77,139.83 90 top
R356  20K  [0603-RES]  91.24,147.85 180 top
R357  20K  [0603-RES]  108.84,139.83 90 top
R358  20K  [0603-RES]  105.16,139.83 90 top
R359  8.2K  [0603-RES]  105.41,143.38 90 top
R360  1K  [0603-RES]  110.62,139.83 90 top
R361  1K  [0603-RES]  107.06,139.83 90 top
R362  390  [0603-RES]  123.95,153.67 0 top
R363  240  [0603-RES]  126.36,156.08 90 top
R364  1K  [0603-RES]  149.73,139.83 90 top
R365  330  [0603-RES]  120.65,153.67 0 top
R366  10K  [TRIMPOT-3MM-2]  145.92,143.76 270 top
R367  .11  [R2010]  131.06,152.4 0 top
R368  .11  [R2010]  139.7,152.4 180 top
R369  20K  [0603-RES]  136.91,139.83 270 top
R370  20K  [0603-RES]  126.49,139.83 90 top
R371  20K  [0603-RES]  129.03,139.83 90 top
R372  20K  [0603-RES]  131.7,139.83 90 top
R373  20K  [0603-RES]  138.81,139.83 90 top
R374  20K  [0603-RES]  134.11,139.83 90 top
R375  20K  [0603-RES]  128.57,147.85 180 top
R376  20K  [0603-RES]  146.18,139.83 90 top
R377  20K  [0603-RES]  142.49,139.83 90 top
R378  8.2K  [0603-RES]  142.75,143.38 90 top
R379  1K  [0603-RES]  147.96,139.83 90 top
R380  1K  [0603-RES]  144.4,139.83 90 top
TP1  TPPAD1-13  [P1-13]  41.15,15.75 0 top
TP2  TPPAD1-13  [P1-13]  78.49,15.75 0 top
TP3  TPPAD1-13  [P1-13]  115.82,15.75 0 top
TP4  TPPAD1-13  [P1-13]  153.16,15.75 0 top
TP5  TPPAD1-13  [P1-13]  41.15,46.74 0 top
TP6  TPPAD1-13  [P1-13]  78.49,46.74 0 top
TP7  TPPAD1-13  [P1-13]  115.82,46.74 0 top
TP8  TPPAD1-13  [P1-13]  153.16,46.74 0 top
TP9  TPPAD1-13  [P1-13]  41.15,77.72 0 top
TP10  TPPAD1-13  [P1-13]  78.49,77.72 0 top
TP11  TPPAD1-13  [P1-13]  115.82,77.72 0 top
TP12  TPPAD1-13  [P1-13]  153.16,77.72 0 top
TP13  TPPAD1-13  [P1-13]  41.15,108.71 0 top
TP14  TPPAD1-13  [P1-13]  78.49,108.71 0 top
TP15  TPPAD1-13  [P1-13]  115.82,108.71 0 top
TP16  TPPAD1-13  [P1-13]  153.16,108.71 0 top
TP17  TPPAD1-13  [P1-13]  41.15,139.7 0 top
TP18  TPPAD1-13  [P1-13]  78.49,139.7 0 top
TP19  TPPAD1-13  [P1-13]  115.82,139.7 0 top
TP20  TPPAD1-13  [P1-13]  153.16,139.7 0 top
U$1  [SCHMALZHAUS_SMALL]  9.25,16.87 0 top
U$2  LOGO-SFENEW  [SFE-NEW-WEBLOGO]  31.72,25.43 0 bottom
U$3  PAD  [PAD-0.008]  19.96,20.6 0 top
U$4  PAD  [PAD-0.008]  26.52,23.09 0 top
U$5  PAD  [PAD-0.008]  23.37,25.15 0 top
U$6  [SCHMALZHAUS_SMALL]  46.58,16.87 0 top
U$7  LOGO-SFENEW  [SFE-NEW-WEBLOGO]  69.06,25.43 0 bottom
U$8  PAD  [PAD-0.008]  57.3,20.6 0 top
U$9  PAD  [PAD-0.008]  63.86,23.09 0 top
U$10  PAD  [PAD-0.008]  60.71,25.15 0 top
U$11  [SCHMALZHAUS_SMALL]  83.92,16.87 0 top
U$12  LOGO-SFENEW  [SFE-NEW-WEBLOGO]  106.4,25.43 0 bottom
U$13  PAD  [PAD-0.008]  94.64,20.6 0 top
U$14  PAD  [PAD-0.008]  101.19,23.09 0 top
U$15  PAD  [PAD-0.008]  98.04,25.15 0 top
U$16  [SCHMALZHAUS_SMALL]  121.26,16.87 0 top
U$17  LOGO-SFENEW  [SFE-NEW-WEBLOGO]  143.74,25.43 0 bottom
U$18  PAD  [PAD-0.008]  131.98,20.6 0 top
U$19  PAD  [PAD-0.008]  138.53,23.09 0 top
U$20  PAD  [PAD-0.008]  135.38,25.15 0 top
U$21  [SCHMALZHAUS_SMALL]  9.25,47.85 0 top
U$22  LOGO-SFENEW  [SFE-NEW-WEBLOGO]  31.72,56.41 0 bottom
U$23  PAD  [PAD-0.008]  19.96,51.59 0 top
U$24  PAD  [PAD-0.008]  26.52,54.08 0 top
U$25  PAD  [PAD-0.008]  23.37,56.13 0 top
U$26  [SCHMALZHAUS_SMALL]  46.58,47.85 0 top
U$27  LOGO-SFENEW  [SFE-NEW-WEBLOGO]  69.06,56.41 0 bottom
U$28  PAD  [PAD-0.008]  57.3,51.59 0 top
U$29  PAD  [PAD-0.008]  63.86,54.08 0 top
U$30  PAD  [PAD-0.008]  60.71,56.13 0 top
U$31  [SCHMALZHAUS_SMALL]  83.92,47.85 0 top
U$32  LOGO-SFENEW  [SFE-NEW-WEBLOGO]  106.4,56.41 0 bottom